# Altium PCB CFD_2Channel.PcbDoc (part 1 of 2)
Units mil, origin at the board's own origin, x right, y up, seen from the top; angles counter-clockwise.
Board outline 14830 x 9705 mil, 4 copper layers (Top Layer, Top Plane, Bottom Plane, Bottom Layer), stack 61.356 mil thick; 263 components, 220 nets, 1141 pads, 50 vias.
Unrouted connection lines stored in the file: 820.
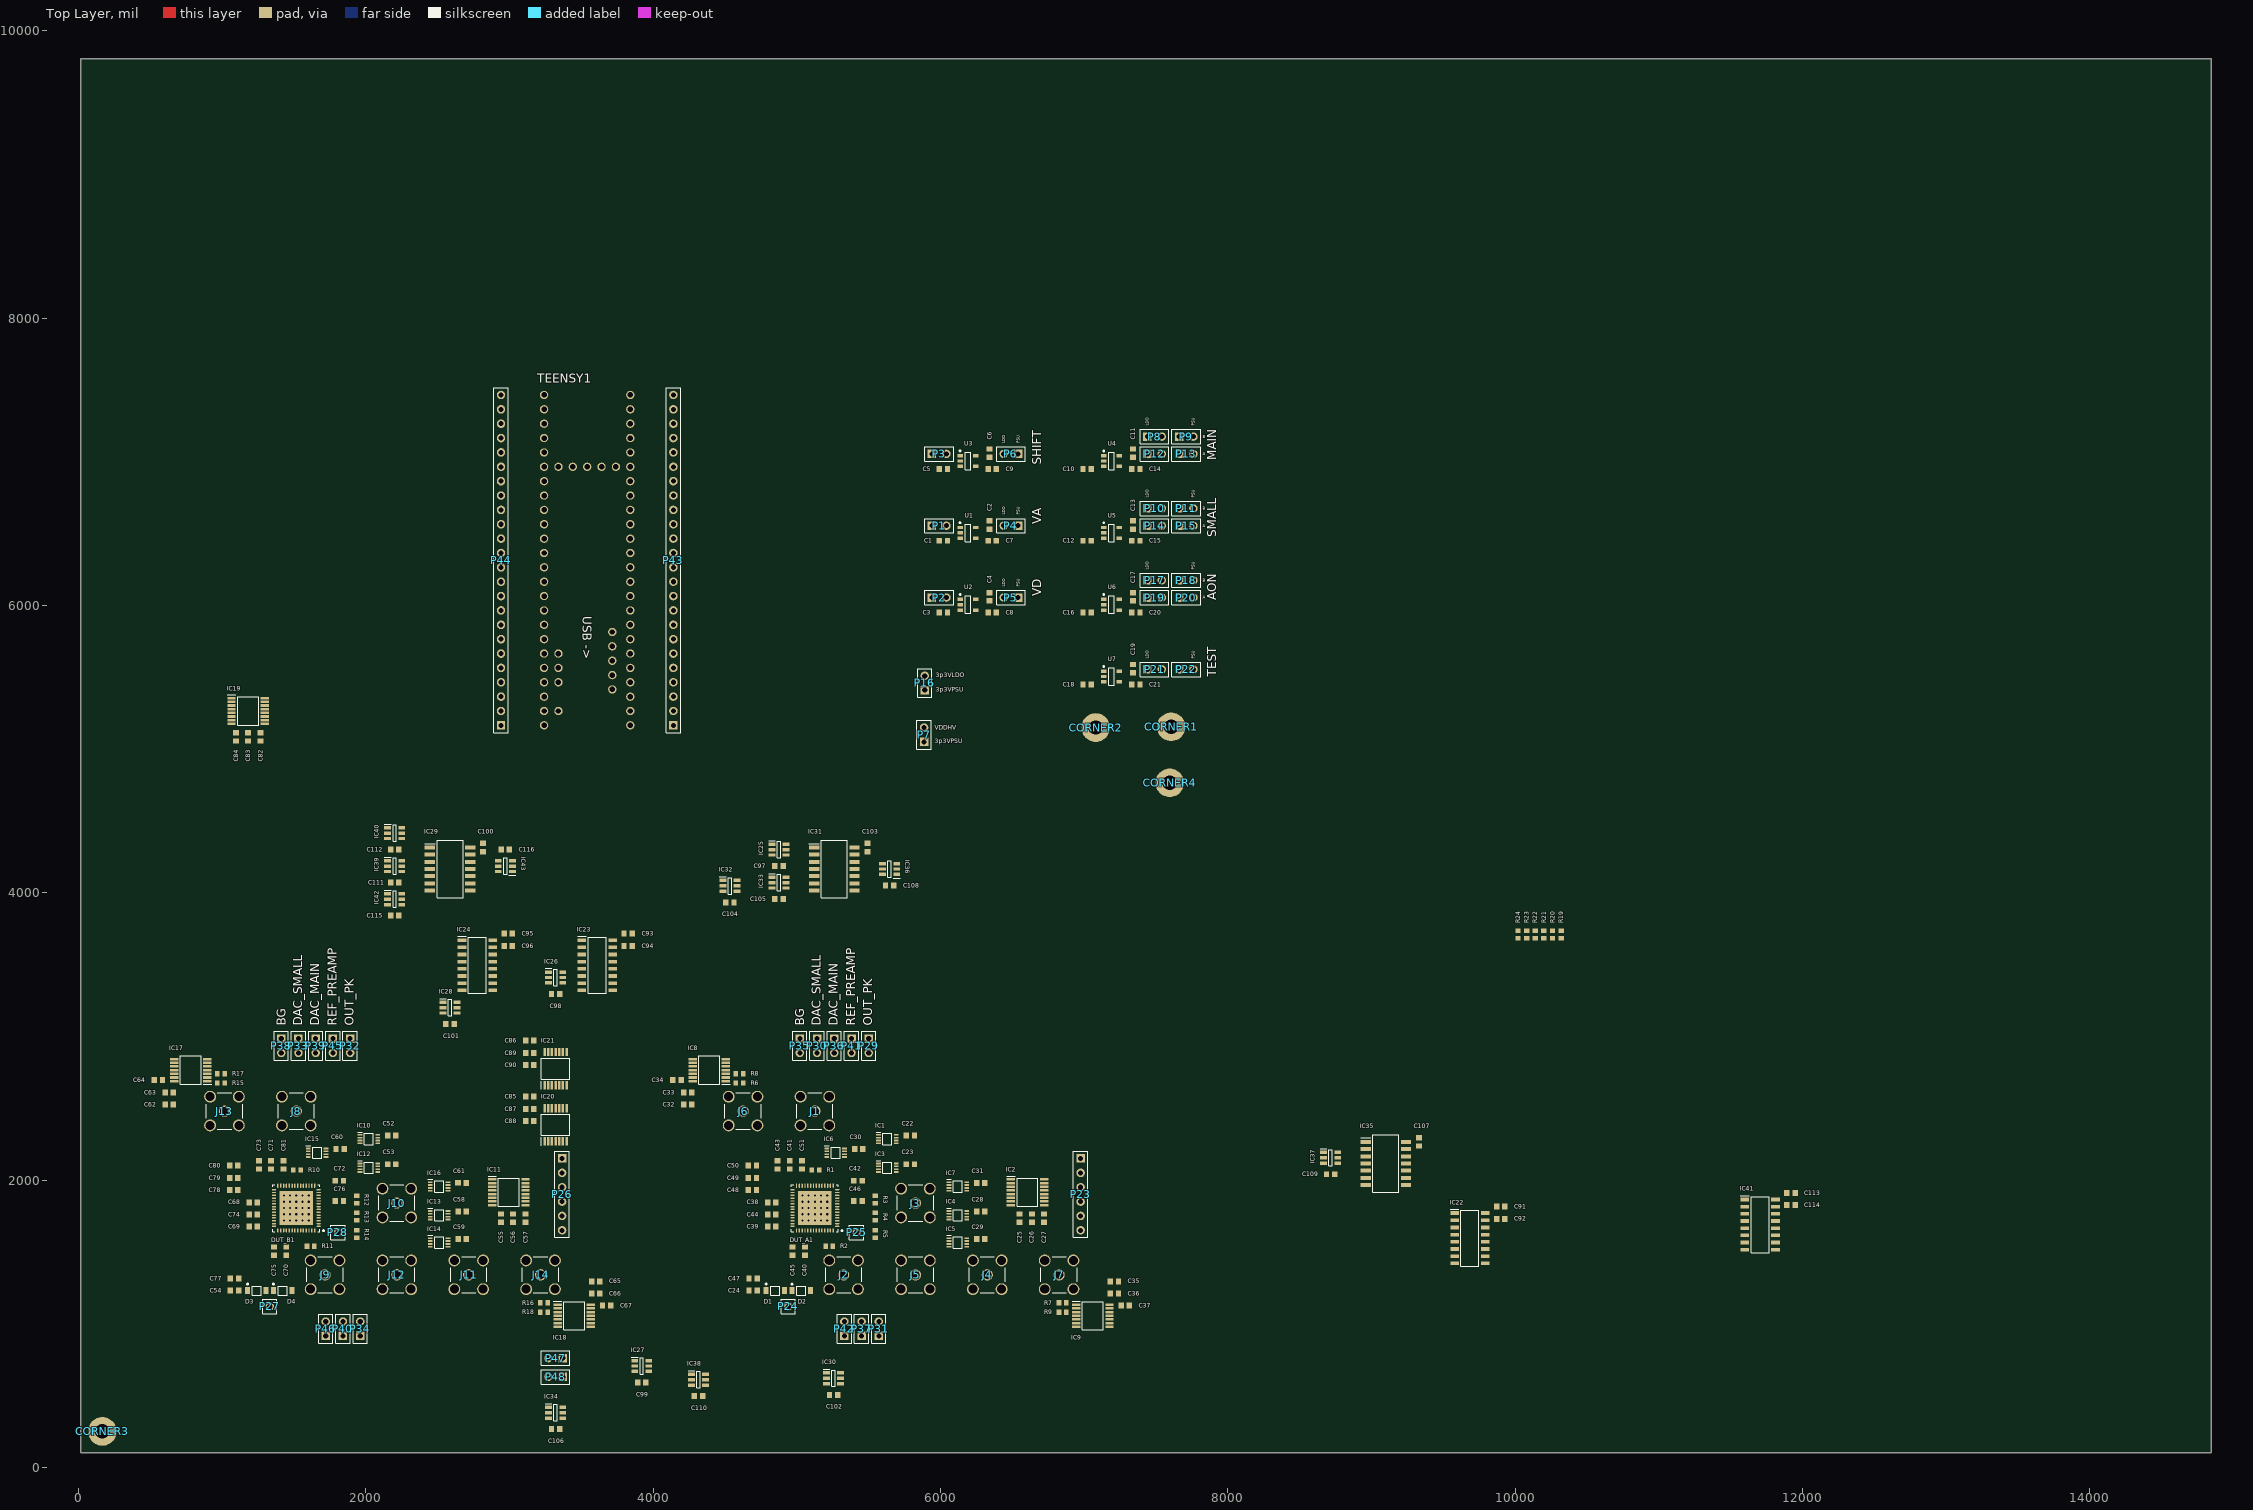
[diagram p0: Top Layer view]
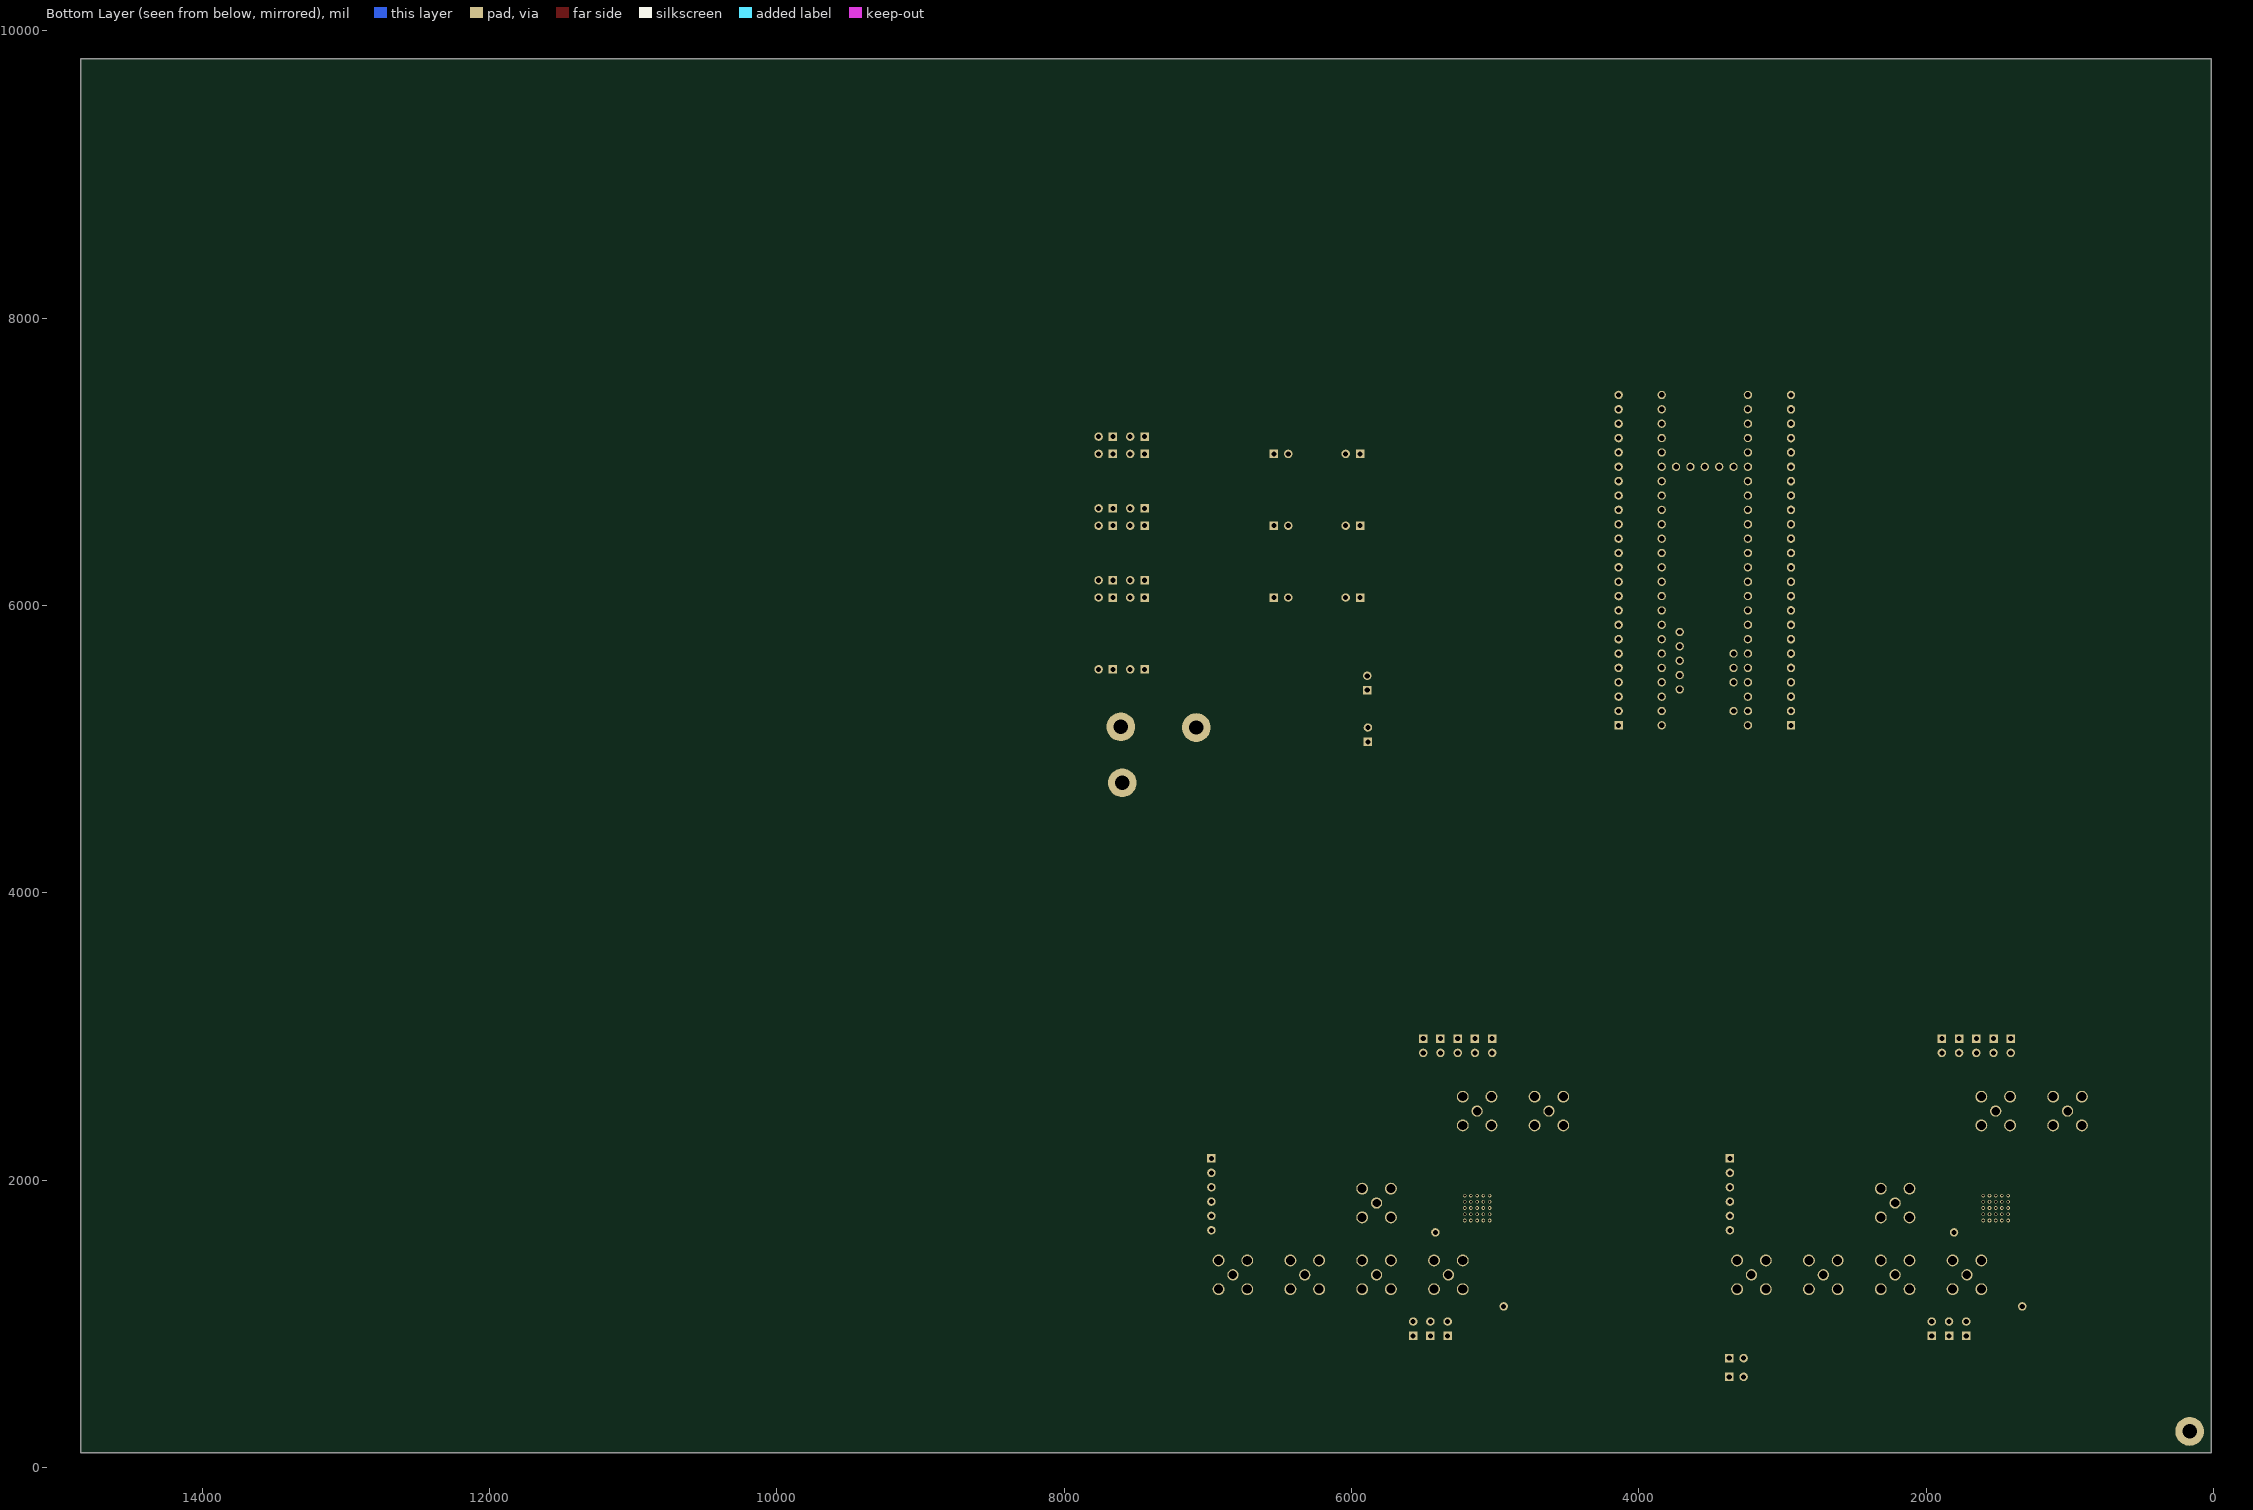
[diagram p1: Bottom Layer view, seen from below]
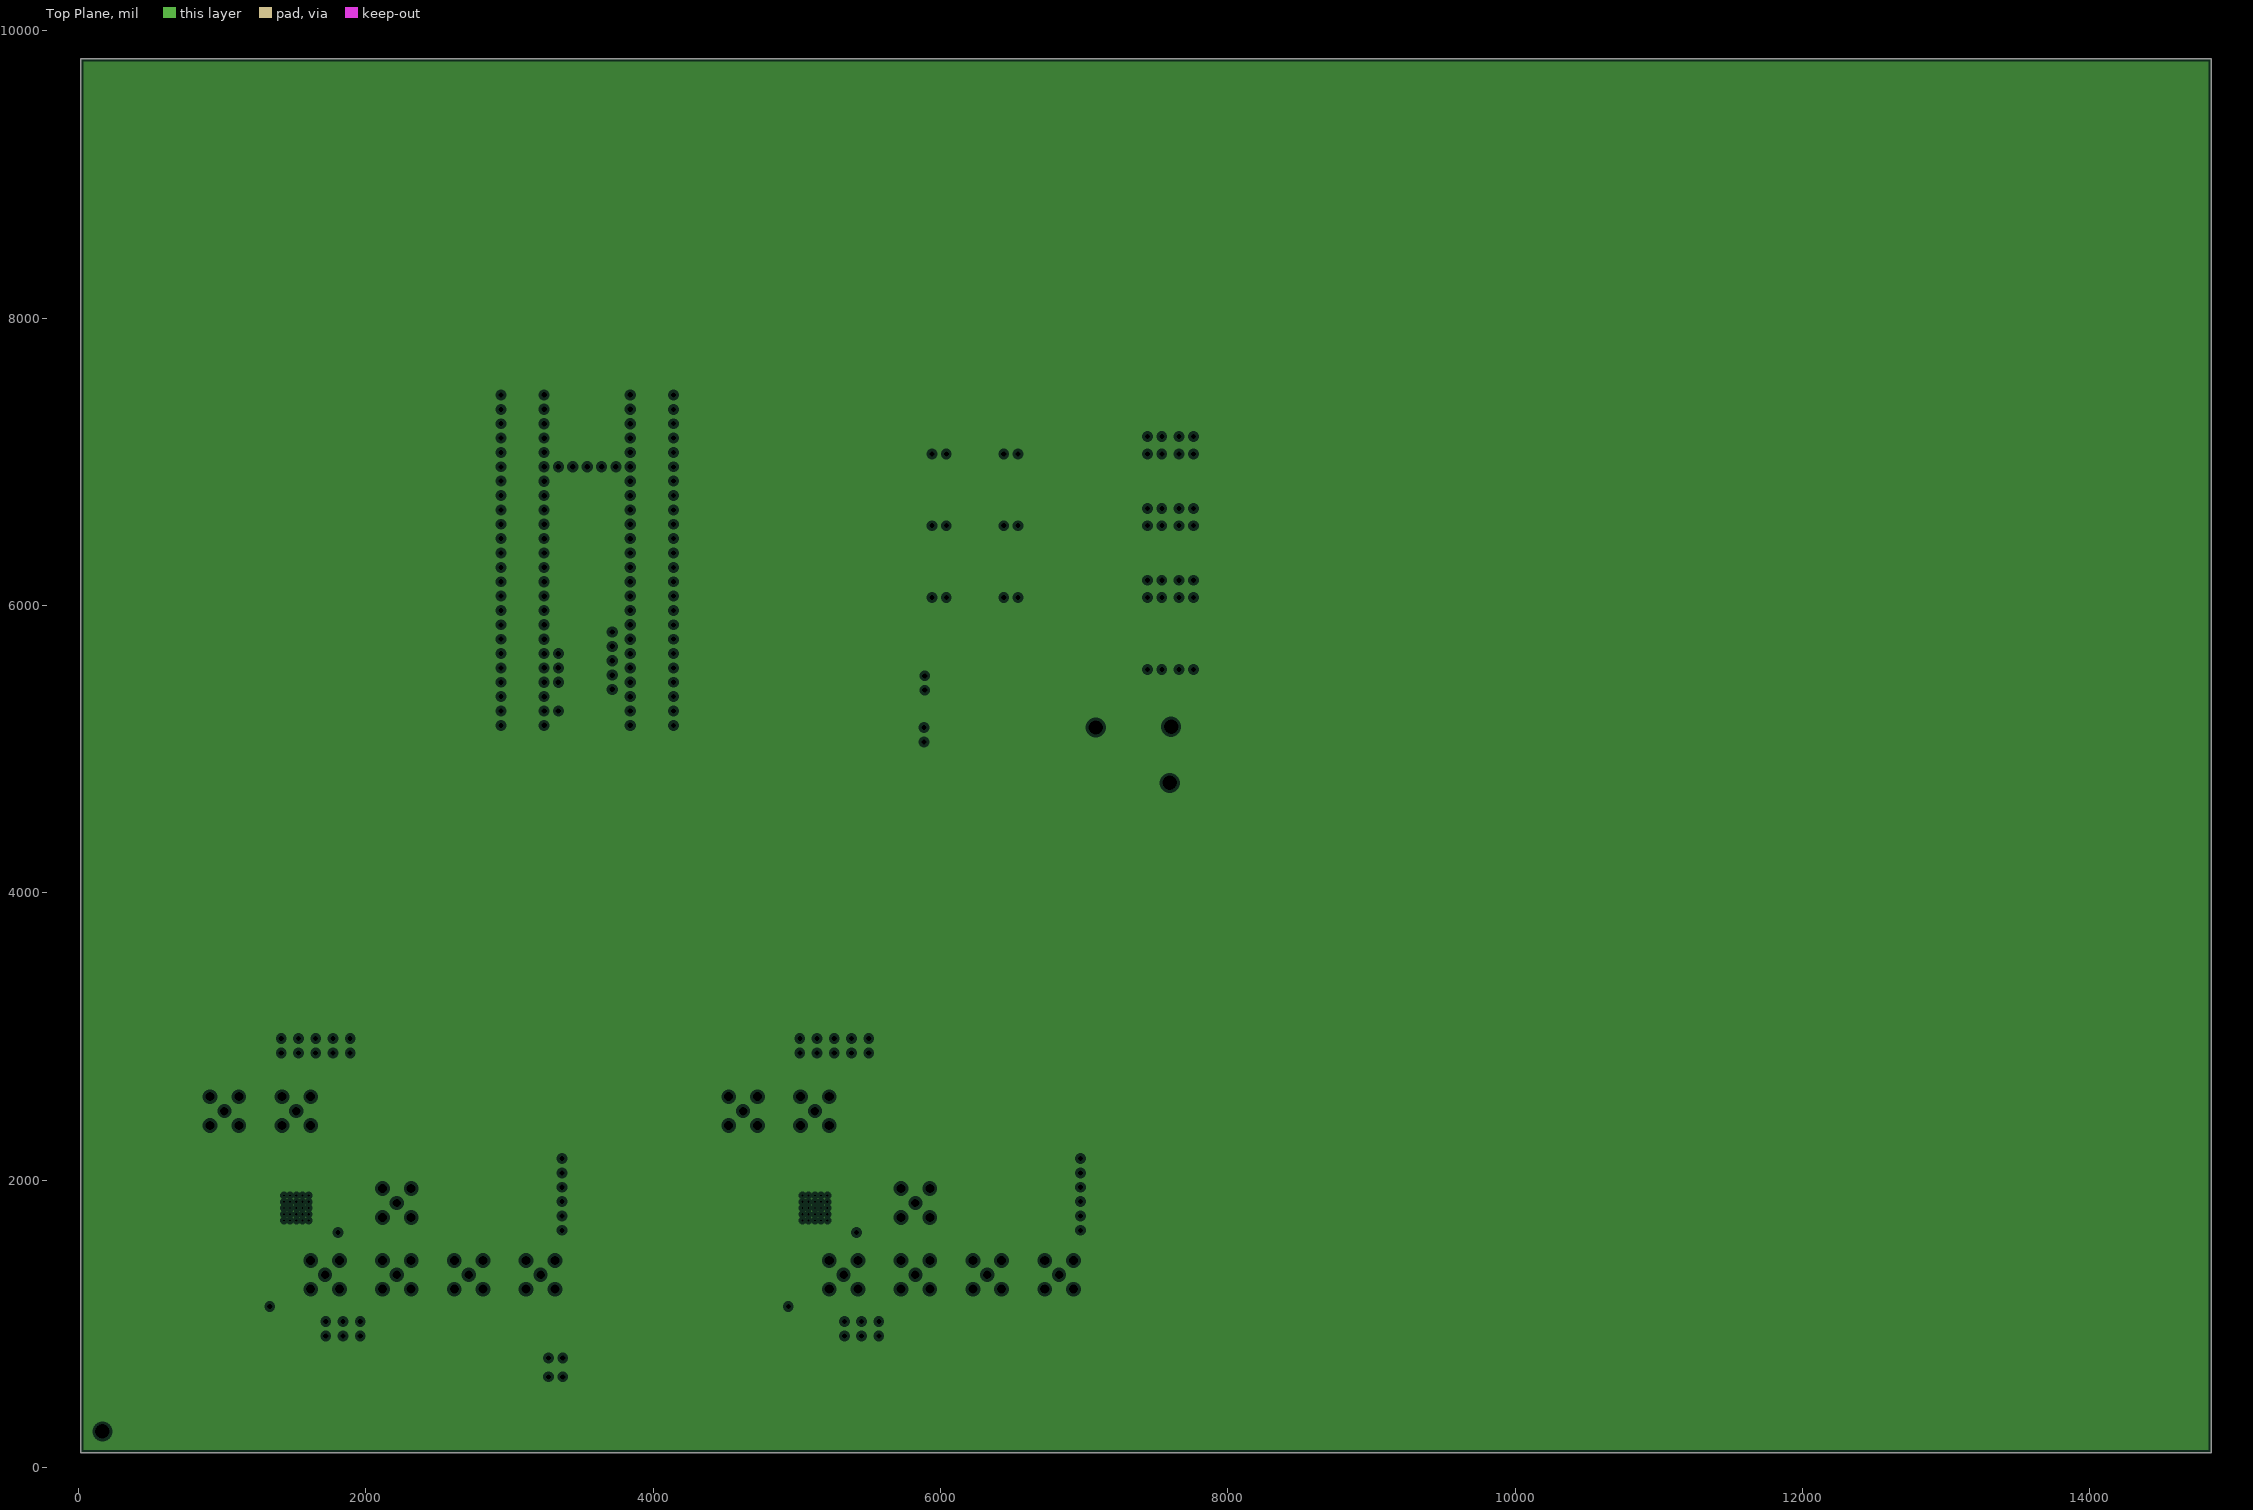
[diagram p2: Top Plane, clearances drawn from the general rule]
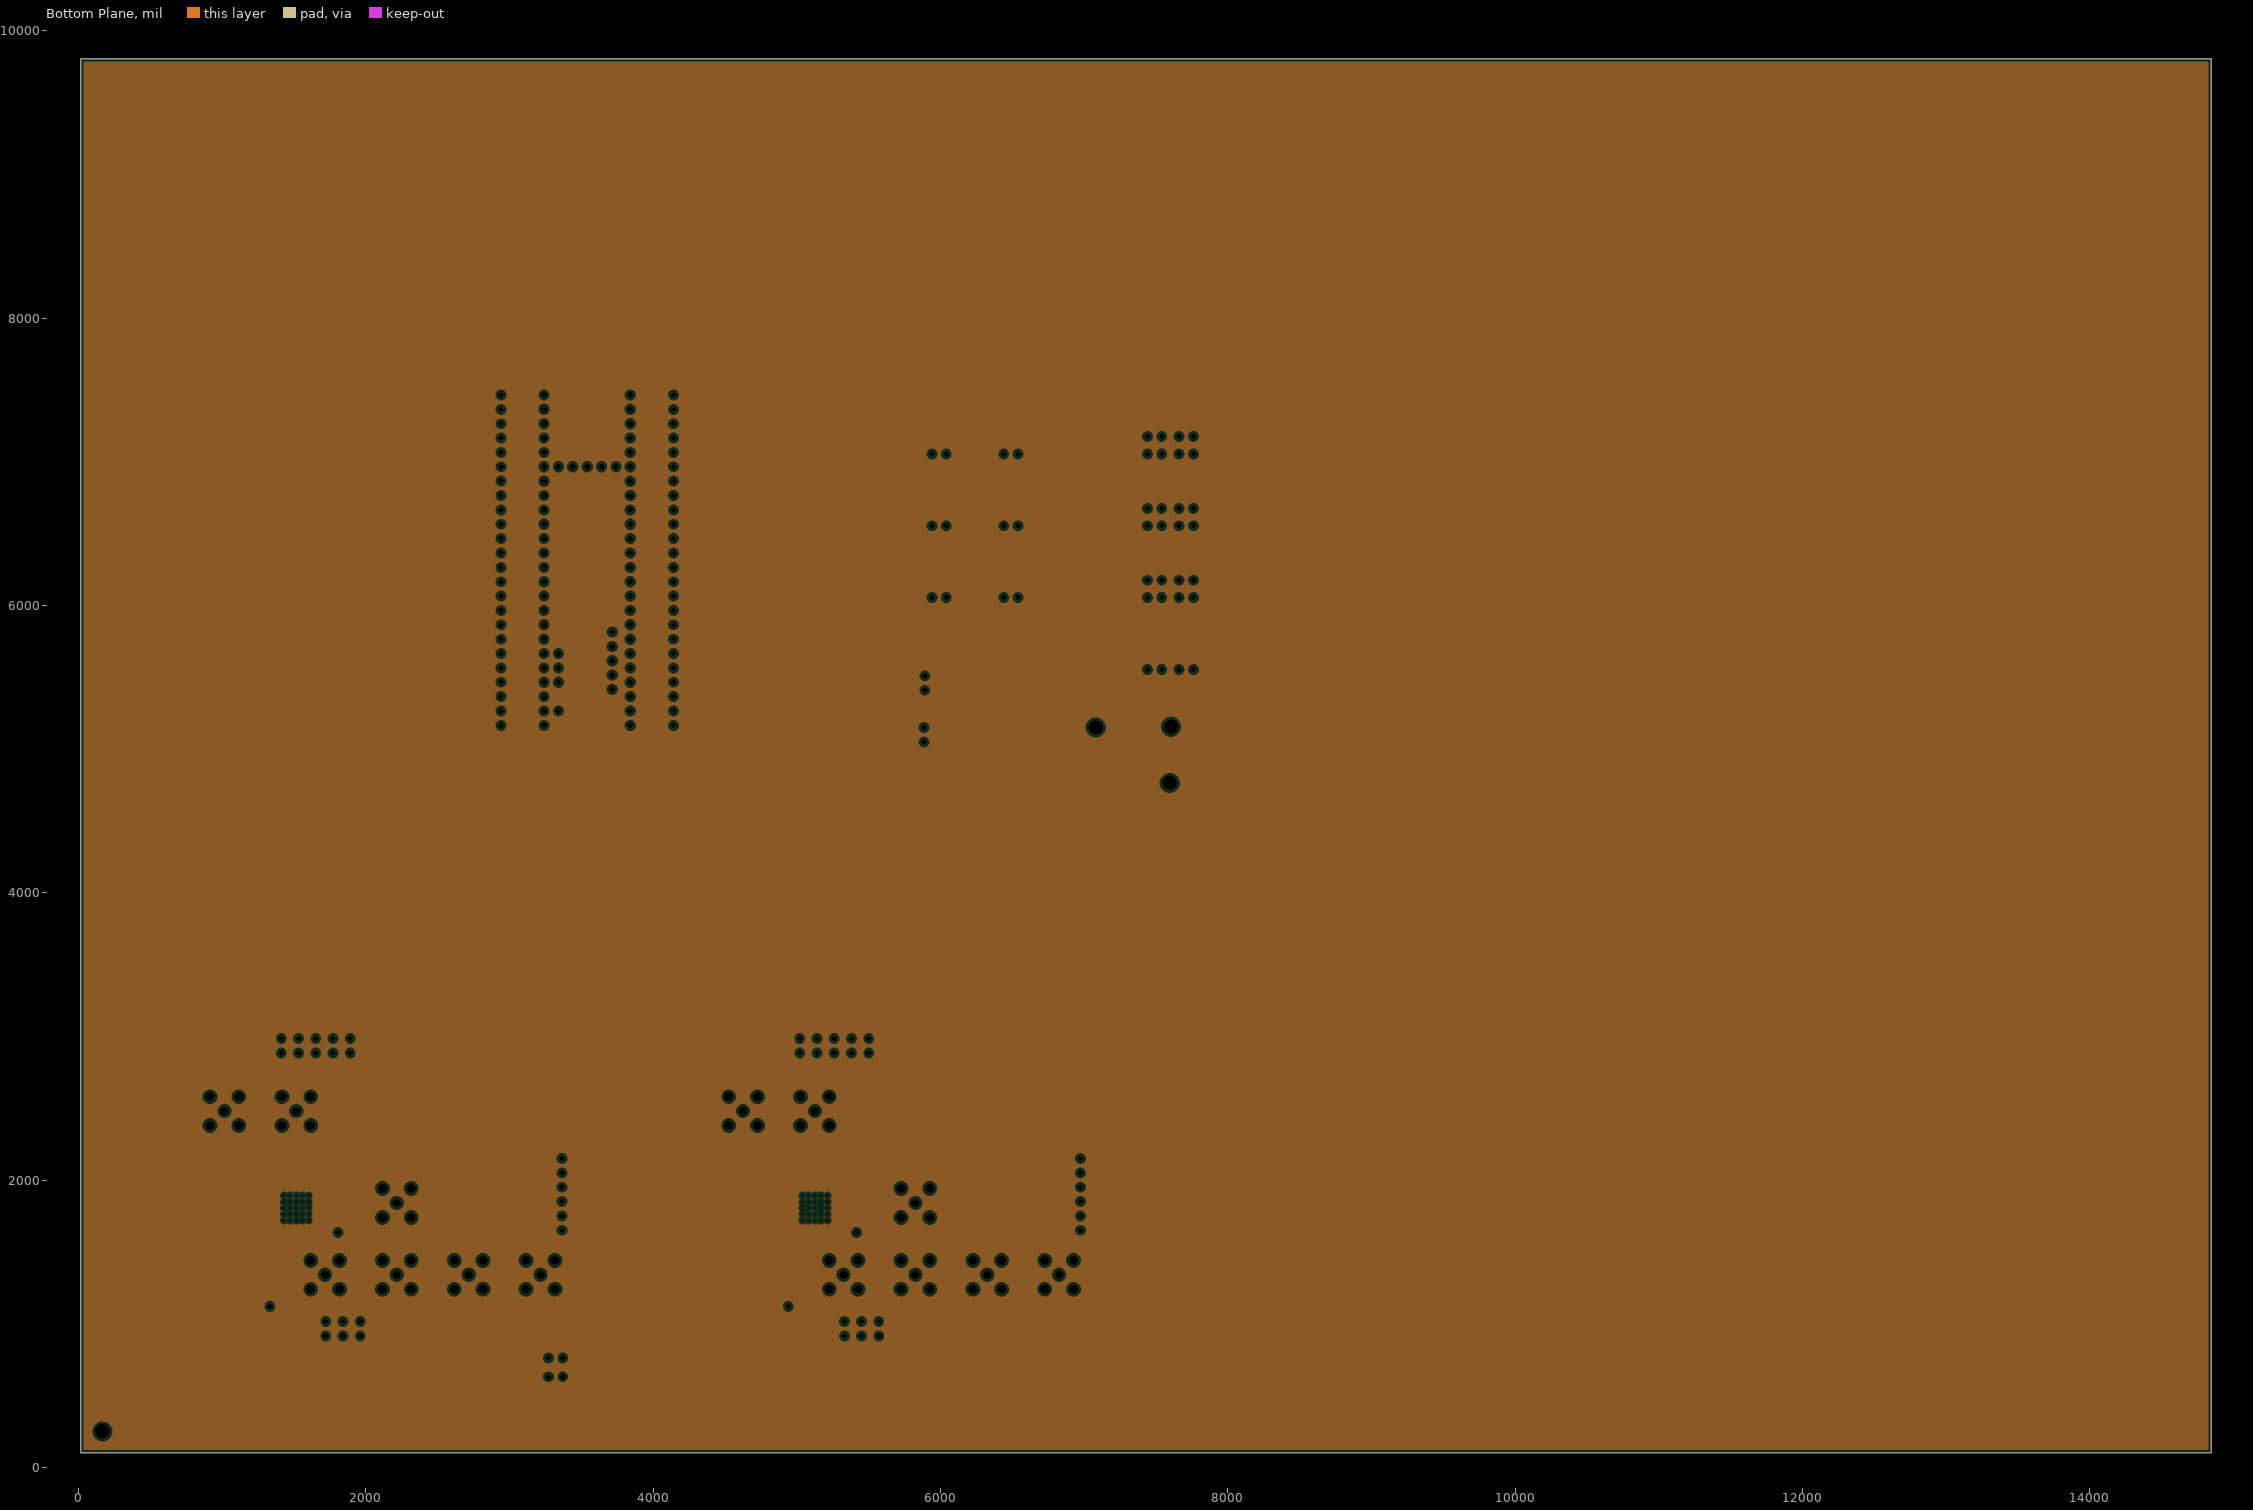
[diagram p3: Bottom Plane, clearances drawn from the general rule]

## Layer stack, top to bottom
Top Solder: solder mask 0.4, Solder Resist, Dk 3.5
Top Layer: signal copper 1.4
Dielectric 2: prepreg 3.8, PP-013, Dk 4.3
Dielectric 4: prepreg 4.6, PP-016, Dk 4.4
Top Plane: plane copper 1.378
Dielectric 1: core 39, Core-042, Dk 4.6
Bottom Plane: plane copper 1.378
Dielectric 5: prepreg 4.6, PP-016, Dk 4.4
Dielectric 3: prepreg 3.8, PP-013, Dk 4.3
Bottom Layer: signal copper 1.4
Bottom Solder: solder mask 0.4, Solder Resist, Dk 3.5

## Board outline
15,100 14845,100 14845,9805 15,9805

## Design rules (kind name [scope] priority, off if disabled: settings)
AcuteAngle [All] p1: minimum=6.00000000000000E+0001 checktracksonly=FALSE
BoardOutlineClearance [All] p1: gap=15 ignorepadtopadclearanceinfootprint=FALSE
Clearance Clearance_outa_inner2 [InNamedPolygon('outa_inner2')] p1: gap=40 ignorepadtopadclearanceinfootprint=FALSE except(0: Arc-Hole Track-Hole SMDPad-Hole THPad-Hole Via-Hole Fill-Hole Poly-Hole Region-Hole Text-Hole)
Clearance Clearance_gnd_adc_vbus [InNamedPolygon('gnd_adc') vs InNet('VBUS')] p2: gap=60 ignorepadtopadclearanceinfootprint=FALSE except(0: Arc-Hole Track-Hole SMDPad-Hole THPad-Hole Via-Hole Fill-Hole Poly-Hole Region-Hole Text-Hole)
Clearance Clearance_gnd_adc [InNamedPolygon('gnd_adc')] p3: gap=20 ignorepadtopadclearanceinfootprint=FALSE except(0: Arc-Hole Track-Hole SMDPad-Hole THPad-Hole Via-Hole Fill-Hole Poly-Hole Region-Hole Text-Hole)
Clearance Clearance_dgnd [InNamedPolygon('dgnd')] p4: gap=15 ignorepadtopadclearanceinfootprint=FALSE except(0: Arc-Hole Track-Hole SMDPad-Hole THPad-Hole Via-Hole Fill-Hole Poly-Hole Region-Hole Text-Hole)
Clearance Clearance_vbus_keepout [InPolygon vs OnLayer('Keep-Out Layer')] p5: gap=20 ignorepadtopadclearanceinfootprint=FALSE except(0: Arc-Hole Track-Hole SMDPad-Hole THPad-Hole Via-Hole Fill-Hole Poly-Hole Region-Hole Text-Hole)
Clearance Clearance_vbus [InNamedPolygon('vbus')] p6: gap=60 ignorepadtopadclearanceinfootprint=FALSE except(0: Arc-Hole Track-Hole SMDPad-Hole THPad-Hole Via-Hole Fill-Hole Poly-Hole Region-Hole Text-Hole)
Clearance Clearance_gnd [InNamedPolygon('gnd')] p7: gap=10 ignorepadtopadclearanceinfootprint=FALSE except(0: Arc-Hole Track-Hole SMDPad-Hole THPad-Hole Via-Hole Fill-Hole Poly-Hole Region-Hole Text-Hole)
Clearance [All] p8: gap=5 ignorepadtopadclearanceinfootprint=FALSE except(0: Arc-Hole Track-Hole SMDPad-Hole THPad-Hole Via-Hole Fill-Hole Poly-Hole Region-Hole Text-Hole)
DiffPairsRouting [All] p1: maxlimit=25 minlimit=5 mostfreqgap=6 toplayer_minwidth=10 toplayer_maxwidth=15 toplayer_prefwidth=15 bottomlayer_minwidth=10 bottomlayer_maxwidth=15 bottomlayer_prefwidth=15 maxuncoupledlength=500
HoleSize [All] p1: absolutevalues=TRUE maxlimit=300 minlimit=10 maxpercent=80.000 minpercent=20.000
MinimumAnnularRing [All] p1: minimumring=5
MinimumSolderMaskSliver [All] p1: minsoldermaskwidth=2
PlaneClearance [All] p1: clearance=20
PlaneConnect [All] p1: planeconnectstyle=Relief reliefexpansion=5 reliefentries=4 reliefconductorwidth=10 reliefairgap=10
PolygonConnect PolygonConnect_4 [All vs IsNamedPolygon('NONET_L-01_P-001')] p1: thpad.connectstyle=Relief thpad.reliefconductorwidth=20 thpad.reliefentries=4 thpad.polygonreliefangle="90 Angle" thpad.airgapwidth=10 smdpad.connectstyle=Direct smdpad.reliefconductorwidth=10 smdpad.reliefentries=4 smdpad.polygonreliefangle="90 Angle" smdpad.airgapwidth=10 via.connectstyle=Relief via.reliefconductorwidth=20 via.reliefentries=4 via.polygonreliefangle="90 Angle" via.airgapwidth=10
PolygonConnect PolygonConnect_3 [All] p2: thpad.connectstyle=Relief thpad.reliefconductorwidth=20 thpad.reliefentries=4 thpad.polygonreliefangle="90 Angle" thpad.airgapwidth=10 smdpad.connectstyle=Direct smdpad.reliefconductorwidth=10 smdpad.reliefentries=4 smdpad.polygonreliefangle="90 Angle" smdpad.airgapwidth=10 via.connectstyle=Relief via.reliefconductorwidth=20 via.reliefentries=4 via.polygonreliefangle="90 Angle" via.airgapwidth=10
PolygonConnect PolygonConnect_2 [All vs IsNamedPolygon('NONET_L-01_P-001')] p3: thpad.connectstyle=Relief thpad.reliefconductorwidth=10 thpad.reliefentries=4 thpad.polygonreliefangle="90 Angle" thpad.airgapwidth=10 smdpad.connectstyle=Direct smdpad.reliefconductorwidth=10 smdpad.reliefentries=4 smdpad.polygonreliefangle="90 Angle" smdpad.airgapwidth=10 via.connectstyle=Relief via.reliefconductorwidth=20 via.reliefentries=4 via.polygonreliefangle="90 Angle" via.airgapwidth=10
PolygonConnect PolygonConnect_1 [All vs IsNamedPolygon('NONET_L-01_P-001')] p4: thpad.connectstyle=Relief thpad.reliefconductorwidth=10 thpad.reliefentries=4 thpad.polygonreliefangle="90 Angle" thpad.airgapwidth=10 smdpad.connectstyle=Direct smdpad.reliefconductorwidth=10 smdpad.reliefentries=4 smdpad.polygonreliefangle="90 Angle" smdpad.airgapwidth=10 via.connectstyle=Relief via.reliefconductorwidth=20 via.reliefentries=4 via.polygonreliefangle="90 Angle" via.airgapwidth=10
PolygonConnect [All] p5: connectstyle=Relief reliefconductorwidth=6 reliefentries=4 polygonreliefangle="90 Angle" airgapwidth=6
RoomDefinition Channel_B [InComponentClass('Channel_B')] p1: confinementstyle=ConfineIn formatcopy=TRUE lockcomponents=FALSE outline 330,925 3940,925 3940,3045 330,3045
RoomDefinition Dual_Channel [InComponentClass('Dual_Channel')] p2: confinementstyle=ConfineIn formatcopy=TRUE lockcomponents=FALSE outline 2850,2215 3735,2215 3735,3110 2850,3110
RoomDefinition Channel_A [InComponentClass('Channel_A')] p3: confinementstyle=ConfineIn formatcopy=TRUE lockcomponents=FALSE outline 3940,925 7550,925 7550,3045 3940,3045
RoutingVias [All] p1: holewidth=12 width=24 viastyle="Through Hole" minholewidth=10 minwidth=22 maxholewidth=200 maxwidth=200
SilkToSilkClearance [All] p1: silktosilkclearance=5
SilkToSolderMaskClearance [IsPad] p1: minsilkscreentomaskgap=3 clearancetoexposedcopper=FALSE
SolderMaskExpansion [All] p1: expansion=2.2 istentingtop=FALSE
Width [All] p1: maxlimit=1000 minlimit=5 preferedwidth=10 minimp=50.000000 maximp=50.000000 favimp=50.000000
23 further rules are at their usual default settings.

## Classes and differential pairs
component class Teensy_Interface: C82 C83 C84 IC19 P29 P30 P31 P32 P33 P34 P35 P36 P37 P38 P39 P40 P41 P42 P43 P44 P45 P46 TEENSY1
component class Power: C1 C2 C3 C4 C5 C6 C7 C8 C9 C10 C11 C12 C13 C14 C15 C16 C17 C18 C19 C20 C21 CORNER1 CORNER2 CORNER3 CORNER4 P1 P2 P3 P4 P5 P6 P7 P8 P9 P10 P11 P12 P13 P14 P15 P16 P17 P18 P19 P20 P21 P22 U1 U2 U3 U4 U5 U6 U7
component class Mux_Demux: C91 C92 C93 C94 C95 C96 C97 C98 C99 C100 C101 C102 C103 C104 C105 C106 C107 C108 C109 C110 C111 C112 C113 C114 C115 C116 IC22 IC23 IC24 IC25 IC26 IC27 IC28 IC29 IC30 IC31 IC32 IC33 IC34 IC35 IC36 IC37 IC38 IC39 IC40 IC41 IC42 IC43 P47 P48 R19 R20 R21 R22 R23 R24
component class Dual_Channel: C85 C86 C87 C88 C89 C90 IC20 IC21
component class Channel_B: C52 C53 C54 C55 C56 C57 C58 C59 C60 C61 C62 C63 C64 C65 C66 C67 C68 C69 C70 C71 C72 C73 C74 C75 C76 C77 C78 C79 C80 C81 D3 D4 DUT_B1 IC10 IC11 IC12 IC13 IC14 IC15 IC16 IC17 IC18 J8 J9 J10 J11 J12 J13 J14 P26 P27 P28 R10 R11 R12 R13 R14 R15 R16 R17 R18
component class Channel_A: C22 C23 C24 C25 C26 C27 C28 C29 C30 C31 C32 C33 C34 C35 C36 C37 C38 C39 C40 C41 C42 C43 C44 C45 C46 C47 C48 C49 C50 C51 D1 D2 DUT_A1 IC1 IC2 IC3 IC4 IC5 IC6 IC7 IC8 IC9 J1 J2 J3 J4 J5 J6 J7 P23 P24 P25 R1 R2 R3 R4 R5 R6 R7 R8 R9

## Components (designator, comment, footprint, x,y, rotation, side; value= is the part's Value field where it differs from the comment)
C1 "(Value)" CAPC1608X90X35ML10T15#1 6020,6450 r180 top
C2 "(Value)" CAPC1608X90X35ML10T15#1 6340,6560 r90 top
C3 "(Value)" CAPC1608X90X35ML10T15#1 6020,5950 r180 top
C4 "(Value)" CAPC1608X90X35ML10T15#1 6340,6060 r90 top
C5 "(Value)" CAPC1608X90X35ML10T15#1 6020,6950 r180 top
C6 "(Value)" CAPC1608X90X35ML10T15#1 6340,7060 r90 top
C7 "(Value)" CAPC1608X90X35ML10T15#1 6360,6450 r0 top
C8 "(Value)" CAPC1608X90X35ML10T15#1 6360,5950 r0 top
C9 "(Value)" CAPC1608X90X35ML10T15#1 6360,6950 r0 top
C10 "(Value)" CAPC1608X90X35ML10T15#1 7020,6950 r180 top
C11 "(Value)" CAPC1608X90X35ML10T15#1 7340,7060 r90 top
C12 "(Value)" CAPC1608X90X35ML10T15#1 7020,6450 r180 top
C13 "(Value)" CAPC1608X90X35ML10T15#1 7340,6560 r90 top
C14 "(Value)" CAPC1608X90X35ML10T15#1 7360,6950 r0 top
C15 "(Value)" CAPC1608X90X35ML10T15#1 7360,6450 r0 top
C16 "(Value)" CAPC1608X90X35ML10T15#1 7020,5950 r180 top
C17 "(Value)" CAPC1608X90X35ML10T15#1 7340,6060 r90 top
C18 "(Value)" CAPC1608X90X35ML10T15#1 7020,5450 r180 top
C19 "(Value)" CAPC1608X90X35ML10T15#1 7340,5560 r90 top
C20 "(Value)" CAPC1608X90X35ML10T15#1 7360,5950 r0 top
C21 "(Value)" CAPC1608X90X35ML10T15#1 7360,5450 r0 top
C22 "10nF" CAPC1608X90X35ML10T15#1 5790,2310 r0 top
C23 "10nF" CAPC1608X90X35ML10T15#1 5790,2110 r0 top
C24 "10nF" CAPC1608X90X35ML10T15#1 4695,1230 r0 top
C25 "100nF" CAPC1608X90X35ML10T15#1 6550,1735 r90 top
C26 "100nF" CAPC1608X90X35ML10T15#1 6635,1735 r90 top
C27 "10nF" CAPC1608X90X35ML10T15#1 6720,1735 r90 top
C28 "10nF" CAPC1608X90X35ML10T15#1 6280,1780 r0 top
C29 "10nF" CAPC1608X90X35ML10T15#1 6280,1590 r180 top
C30 "10nF" CAPC1608X90X35ML10T15#1 5430,2215 r180 top
C31 "10nF" CAPC1608X90X35ML10T15#1 6280,1980 r180 top
C32 "100nF" CAPC1608X90X35ML10T15#1 4240,2525 r180 top
C33 "1uF" CAPC1608X90X35ML10T15#1 4240,2610 r180 top
C34 "1uF" CAPC1608X90X35ML10T15#1 4165,2695 r180 top
C35 "100nF" CAPC1608X90X35ML10T15#1 7210,1295 r0 top
C36 "1uF" CAPC1608X90X35ML10T15#1 7210,1210 r0 top
C37 "1uF" CAPC1608X90X35ML10T15#1 7285,1125 r0 top
C38 "10nF" CAPC1608X90X35ML10T15#1 4825,1845 r0 top
C39 "10nF" CAPC1608X90X35ML10T15#1 4825,1675 r0 top
C40 "10nF" CAPC1608X90X35ML10T15#1 5055,1505 r90 top
C41 "10nF" CAPC1608X90X35ML10T15#1 4950,2105 r270 top
C42 "10nF" CAPC1608X90X35ML10T15#1 5425,1995 r180 top
C43 "10nF" CAPC1608X90X35ML10T15#1 4865,2105 r270 top
C44 "10nF" CAPC1608X90X35ML10T15#1 4825,1760 r0 top
C45 "10nF" CAPC1608X90X35ML10T15#1 4970,1505 r90 top
C46 "10nF" CAPC1608X90X35ML10T15#1 5425,1855 r180 top
C47 "10nF" CAPC1608X90X35ML10T15#1 4695,1315 r0 top
C48 "10nF" CAPC1608X90X35ML10T15#1 4690,1930 r0 top
C49 "10nF" CAPC1608X90X35ML10T15#1 4690,2015 r0 top
C50 "10nF" CAPC1608X90X35ML10T15#1 4690,2100 r0 top
C51 "10nF" CAPC1608X90X35ML10T15#1 5035,2105 r270 top
C52 "10nF" CAPC1608X90X35ML10T15#1 2180,2310 r180 top
C53 "10nF" CAPC1608X90X35ML10T15#1 2180,2110 r180 top
C54 "10nF" CAPC1608X90X35ML10T15#1 1085,1230 r0 top
C55 "100nF" CAPC1608X90X35ML10T15#1 2940,1735 r90 top
C56 "100nF" CAPC1608X90X35ML10T15#1 3025,1735 r90 top
C57 "10nF" CAPC1608X90X35ML10T15#1 3110,1735 r90 top
C58 "10nF" CAPC1608X90X35ML10T15#1 2670,1780 r180 top
C59 "10nF" CAPC1608X90X35ML10T15#1 2670,1590 r180 top
C60 "10nF" CAPC1608X90X35ML10T15#1 1820,2215 r180 top
C61 "10nF" CAPC1608X90X35ML10T15#2 2670,1980 r180 top
C62 "100nF" CAPC1608X90X35ML10T15#1 630,2525 r180 top
C63 "1uF" CAPC1608X90X35ML10T15#1 630,2610 r180 top
C64 "1uF" CAPC1608X90X35ML10T15#1 555,2695 r180 top
C65 "100nF" CAPC1608X90X35ML10T15#1 3600,1295 r0 top
C66 "1uF" CAPC1608X90X35ML10T15#1 3600,1210 r0 top
C67 "1uF" CAPC1608X90X35ML10T15#1 3675,1125 r0 top
C68 "10nF" CAPC1608X90X35ML10T15#1 1215,1845 r0 top
C69 "10nF" CAPC1608X90X35ML10T15#1 1215,1675 r0 top
C70 "10nF" CAPC1608X90X35ML10T15#1 1445,1505 r90 top
C71 "10nF" CAPC1608X90X35ML10T15#1 1340,2105 r270 top
C72 "10nF" CAPC1608X90X35ML10T15#1 1815,1995 r180 top
C73 "10nF" CAPC1608X90X35ML10T15#1 1255,2105 r270 top
C74 "10nF" CAPC1608X90X35ML10T15#1 1215,1760 r0 top
C75 "10nF" CAPC1608X90X35ML10T15#1 1360,1505 r90 top
C76 "10nF" CAPC1608X90X35ML10T15#1 1815,1855 r180 top
C77 "10nF" CAPC1608X90X35ML10T15#1 1085,1315 r0 top
C78 "10nF" CAPC1608X90X35ML10T15#1 1080,1930 r0 top
C79 "10nF" CAPC1608X90X35ML10T15#1 1080,2015 r0 top
C80 "10nF" CAPC1608X90X35ML10T15#1 1080,2100 r0 top
C81 "10nF" CAPC1608X90X35ML10T15#1 1425,2105 r270 top
C82 "1uF" CAPC1608X90X35ML10T15#1 1265,5085 r90 top
C83 "100nF" CAPC1608X90X35ML10T15#1 1180,5085 r90 top
C84 "100nF" CAPC1608X90X35ML10T15#1 1095,5085 r270 top
C85 "1uF" CAPC1608X90X35ML10T15#1 3140,2580 r180 top
C86 "1uF" CAPC1608X90X35ML10T15#1 3140,2970 r180 top
C87 "100nF" CAPC1608X90X35ML10T15#1 3140,2495 r180 top
C88 "1uF" CAPC1608X90X35ML10T15#1 3140,2410 r180 top
C89 "100nF" CAPC1608X90X35ML10T15#1 3140,2885 r180 top
C90 "1uF" CAPC1608X90X35ML10T15#1 3140,2800 r180 top
C91 "10nF" CAPC1608X90X35ML10T15#1 9900,1815 r0 top
C92 "10nF" CAPC1608X90X35ML10T15#1 9900,1730 r0 top
C93 "10nF" CAPC1608X90X35ML10T15#1 3825,3715 r0 top
C94 "10nF" CAPC1608X90X35ML10T15#1 3825,3630 r0 top
C95 "10nF" CAPC1608X90X35ML10T15#1 2990,3715 r0 top
C96 "10nF" CAPC1608X90X35ML10T15#1 2990,3630 r0 top
C97 "10nF" CAPC1608X90X35ML10T15#1 4875,4185 r180 top
C98 "10nF" CAPC1608X90X35ML10T15#1 3320,3295 r180 top
C99 "10nF" CAPC1608X90X35ML10T15#1 3920,590 r180 top
C100 "10nF" CAPC1608X90X35ML10T15#1 2815,4315 r270 top
C101 "10nF" CAPC1608X90X35ML10T15#1 2585,3085 r180 top
C102 "10nF" CAPC1608X90X35ML10T15#1 5255,505 r180 top
C103 "10nF" CAPC1608X90X35ML10T15#1 5490,4315 r270 top
C104 "10nF" CAPC1608X90X35ML10T15#1 4533.61,3933.06 r180 top
C105 "10nF" CAPC1608X90X35ML10T15#1 4875,3955 r180 top
C106 "10nF" CAPC1608X90X35ML10T15#1 3320,265.27 r180 top
C107 "10nF" CAPC1608X90X35ML10T15#1 9330,2265 r90 top
C108 "10nF" CAPC1608X90X35ML10T15#1 5645,4050 r180 top
C109 "10nF" CAPC1608X90X35ML10T15#1 8715,2040 r180 top
C110 "10nF" CAPC1608X90X35ML10T15#1 4315,495 r180 top
C111 "10nF" CAPC1608X90X35ML10T15#1 2200,4070 r180 top
C112 "10nF" CAPC1608X90X35ML10T15#1 2200,4300 r180 top
C113 "10nF" CAPC1608X90X35ML10T15#1 11920,1910 r0 top
C114 "10nF" CAPC1608X90X35ML10T15#1 11920,1825 r0 top
C115 "10nF" CAPC1608X90X35ML10T15#1 2200,3840 r180 top
C116 "10nF" CAPC1608X90X35ML10T15#1 2970,4300 r180 top
CORNER1 "Corner Mount" CornerMount#1 7605,5155 r90 top
CORNER2 "Corner Mount" CornerMount#1 7080,5150 r90 top
CORNER3 "Corner Mount" CornerMount#2 7395,3760 r90 top
CORNER4 "Corner Mount" CornerMount#1 7595,4765 r90 top
D1 "" ONSC-SOD-123-2-425-04_V 4850,1230 r0 top
D2 "" ONSC-SOD-123-2-425-04_V 5030,1230 r0 top
D3 "" ONSC-SOD-123-2-425-04_V 1240,1230 r0 top
D4 "" ONSC-SOD-123-2-425-04_V 1420,1230 r0 top
DUT_A1 "CFD_Respin" QFN50P800X800X80_HS-57N_WIDEVIAS 5125,1805 r180 top
DUT_B1 "CFD_Respin" QFN50P800X800X80_HS-57N_WIDEVIAS 1515,1805 r180 top
IC1 "NL17SZ74USG" SOP50P310X90-8N 5630,2285 r0 top
IC2 "MAX13003EEUE+" SOP65P640X110-16N 6605,1915 r0 top
IC3 "NL17SZ74USG" SOP50P310X90-8N 5630,2085 r0 top
IC4 "NL17SZ74USG" SOP50P310X90-8N 6120,1755 r0 top
IC5 "NL17SZ74USG" SOP50P310X90-8N 6120,1565 r0 top
IC6 "NL17SZ74USG" SOP50P310X90-8N 5270,2190 r0 top
IC7 "NL17SZ74USG" SOP50P310X90-8N 6120,1955 r0 top
IC8 "TDC7200PWR" SOP65P640X120-14N 4390,2765 r180 top
IC9 "TDC7200PWR" SOP65P640X120-14N 7060,1055 r0 top
IC10 "NL17SZ74USG" SOP50P310X90-8N 2020,2285 r0 top
IC11 "MAX13003EEUE+" SOP65P640X110-16N 2995,1915 r0 top
IC12 "NL17SZ74USG" SOP50P310X90-8N 2020,2085 r0 top
IC13 "NL17SZ74USG" SOP50P310X90-8N 2510,1755 r0 top
IC14 "NL17SZ74USG" SOP50P310X90-8N 2510,1565 r0 top
IC15 "NL17SZ74USG" SOP50P310X90-8N 1660,2190 r0 top
IC16 "NL17SZ74USG" SOP50P310X90-8N 2510,1955 r0 top
IC17 "TDC7200PWR" SOP65P640X120-14N 780,2765 r180 top
IC18 "TDC7200PWR" SOP65P640X120-14N 3450,1055 r0 top
IC19 "MAX13003EEUE+" SOP65P640X110-16N 1180,5265 r0 top
IC20 "TDC7200PWR" SOP65P640X120-14N 3320,2385 r90 top
IC21 "TDC7200PWR" SOP65P640X120-14N 3320,2775 r90 top
IC22 "CD74AC153M96" SOIC127P600X175-16N 9685,1595 r0 top
IC23 "CD74AC153M96" SOIC127P600X175-16N 3610,3495 r0 top
IC24 "CD74AC153M96" SOIC127P600X175-16N 2775,3495 r0 top
IC25 "SN74AUC1G19DBVR" SOT95P280X145-6N 4875,4300 r0 top
IC26 "SN74AUC1G19DBVR" SOT95P280X145-6N 3320,3410 r0 top
IC27 "SN74AUC1G19DBVR" SOT95P280X145-6N 3920,705 r0 top
IC28 "SN74AUC1G19DBVR" SOT95P280X145-6N 2585,3200 r0 top
IC29 "SN74LVC04ANS" SOIC127P780X200-14N 2585,4165 r0 top
IC30 "SN74AUC1G19DBVR" SOT95P280X145-6N 5255,620 r0 top
IC31 "SN74LVC04ANS" SOIC127P780X200-14N 5260,4165 r0 top
IC32 "SN74AUC1G19DBVR" SOT95P280X145-6N 4533.61,4048.06 r0 top
IC33 "SN74AUC1G19DBVR" SOT95P280X145-6N 4875,4070 r0 top
IC34 "SN74AUC1G19DBVR" SOT95P280X145-6N 3320,380.27 r0 top
IC35 "SN74LVC04ANS" SOIC127P780X200-14N 9100,2115 r0 top
IC36 "SN74AUC1G19DBVR" SOT95P280X145-6N 5645,4165 r180 top
IC37 "SN74AUC1G19DBVR" SOT95P280X145-6N 8715,2155 r0 top
IC38 "SN74AUC1G19DBVR" SOT95P280X145-6N 4315,610 r0 top
IC39 "SN74AUC1G19DBVR" SOT95P280X145-6N 2200,4185 r0 top
IC40 "SN74AUC1G19DBVR" SOT95P280X145-6N 2200,4415 r0 top
IC41 "CD74AC153M96" SOIC127P600X175-16N 11705,1690 r0 top
IC42 "SN74AUC1G19DBVR" SOT95P280X145-6N 2200,3955 r0 top
IC43 "SN74AUC1G19DBVR" SOT95P280X145-6N 2970,4185 r180 top
J1 "5-1814832-1" TECO-5-1814832-1_V 5125,2480 r0 top
J2 "5-1814832-1" TECO-5-1814832-1_V 5325,1340 r0 top
J3 "5-1814832-1" TECO-5-1814832-1_V 5825,1840 r0 top
J4 "5-1814832-1" TECO-5-1814832-1_V 6325,1340 r0 top
J5 "5-1814832-1" TECO-5-1814832-1_V 5825,1340 r0 top
J6 "5-1814832-1" TECO-5-1814832-1_V 4625,2480 r0 top
J7 "5-1814832-1" TECO-5-1814832-1_V 6825,1340 r0 top
J8 "5-1814832-1" TECO-5-1814832-1_V 1515,2480 r0 top
J9 "5-1814832-1" TECO-5-1814832-1_V 1715,1340 r0 top
J10 "5-1814832-1" TECO-5-1814832-1_V 2215,1840 r0 top
J11 "5-1814832-1" TECO-5-1814832-1_V 2715,1340 r0 top
J12 "5-1814832-1" TECO-5-1814832-1_V 2215,1340 r0 top
J13 "5-1814832-1" TECO-5-1814832-1_V 1015,2480 r180 top
J14 "5-1814832-1" TECO-5-1814832-1_V 3215,1340 r0 top
P1 "Header 2" HDR1X2 5940,6555 r0 top
P2 "Header 2" HDR1X2 5940,6055 r0 top
P3 "Header 2" HDR1X2 5940,7055 r0 top
P4 "Header 2" HDR1X2 6540,6555 r180 top
P5 "Header 2" HDR1X2 6540,6055 r180 top
P6 "Header 2" HDR1X2 6540,7055 r180 top
P7 "Header 2" HDR1X2 5885,5050 r90 top
P8 "Header 2" HDR1X2 7440,7175 r0 top
P9 "Header 2" HDR1X2 7660,7175 r0 top
P10 "Header 2" HDR1X2 7440,6675 r0 top
P11 "Header 2" HDR1X2 7660,6675 r0 top
P12 "Header 2" HDR1X2 7440,7055 r0 top
P13 "Header 2" HDR1X2 7660,7055 r0 top
P14 "Header 2" HDR1X2 7440,6555 r0 top
P15 "Header 2" HDR1X2 7660,6555 r0 top
P16 "Header 2" HDR1X2 5890,5410 r90 top
P17 "Header 2" HDR1X2 7440,6175 r0 top
P18 "Header 2" HDR1X2 7660,6175 r0 top
P19 "Header 2" HDR1X2 7440,6055 r0 top
P20 "Header 2" HDR1X2 7660,6055 r0 top
P21 "Header 2" HDR1X2 7440,5555 r0 top
P22 "Header 2" HDR1X2 7660,5555 r0 top
P23 "Header 6" HDR1X6 6975,2150 r270 top
P24 "Header 1" Header1 4940,1120 r0 top
P25 "Header 1" Header1 5415,1635 r0 top
P26 "Header 6" HDR1X6 3365,2150 r270 top
P27 "Header 1" Header1 1330,1120 r0 top
P28 "Header 1" Header1 1805,1635 r0 top
P29 "Header 2" HDR1X2 5500,2985 r270 top
P30 "Header 2" HDR1X2 5140,2985 r270 top
P31 "Header 2" HDR1X2 5570,915 r90 top
P32 "Header 2" HDR1X2 1890,2985 r270 top
P33 "Header 2" HDR1X2 1530,2985 r270 top
P34 "Header 2" HDR1X2 1960,915 r90 top
P35 "Header 2" HDR1X2 5020,2985 r270 top
P36 "Header 2" HDR1X2 5260,2985 r270 top
P37 "Header 2" HDR1X2 5450,915 r90 top
P38 "Header 2" HDR1X2 1410,2985 r270 top
P39 "Header 2" HDR1X2 1650,2985 r270 top
P40 "Header 2" HDR1X2 1840,915 r90 top
P41 "Header 2" HDR1X2 5380,2985 r270 top
P42 "Header 2" HDR1X2 5330,915 r90 top
P43 "Header 24" HDR1X24 4140,5165 r90 top
P44 "Header 24" HDR1X24 2940,5165 r90 top
P45 "Header 2" HDR1X2 1770,2985 r270 top
P46 "Header 2" HDR1X2 1720,915 r90 top
P47 "Header 2" HDR1X2 3370,760 r180 top
P48 "Header 2" HDR1X2 3370,630 r180 top
R1 "(50Ohm)" RESC1609X50X30NL8T20 5130,2070 r0 top
R2 "(50Ohm)" RESC1609X50X30NL8T20 5225,1540 r0 top
R3 "(50Ohm)" RESC1609X50X30NL8T20 5545,1865 r270 top
R4 "(50Ohm)" RESC1609X50X30NL8T20 5545,1745 r270 top
R5 "(50Ohm)" RESC1609X50X30NL8T20 5545,1625 r90 top
R6 "(50Ohm)" RESC1609X50X30NL8T20 4600,2675 r0 top
R7 "(50Ohm)" RESC1609X50X30NL8T20 6850,1145 r180 top
R8 "(<50Ohm)" RESC1609X50X30NL8T20 4600,2740 r180 top
R9 "(<50Ohm)" RESC1609X50X30NL8T20 6850,1080 r0 top
R10 "(50Ohm)" RESC1609X50X30NL8T20 1520,2070 r0 top
R11 "(50Ohm)" RESC1609X50X30NL8T20 1615,1540 r180 top
R12 "(50Ohm)" RESC1609X50X30NL8T20 1935,1865 r270 top
R13 "(50Ohm)" RESC1609X50X30NL8T20 1935,1745 r270 top
R14 "(50Ohm)" RESC1609X50X30NL8T20 1935,1625 r90 top
R15 "(50Ohm)" RESC1609X50X30NL8T20 990,2675 r0 top
R16 "(50Ohm)" RESC1609X50X30NL8T20 3240,1145 r180 top
R17 "(<50Ohm)" RESC1609X50X30NL8T20 990,2740 r180 top
R18 "(<50Ohm)" RESC1609X50X30NL8T20 3240,1080 r0 top
R19 "0Ohm" RESC1609X50X30NL8T20 10320,3710 r90 top
R20 "0Ohm" RESC1609X50X30NL8T20 10260,3710 r90 top
R21 "0Ohm" RESC1609X50X30NL8T20 10200,3710 r90 top
R22 "0Ohm" RESC1609X50X30NL8T20 10140,3710 r90 top
R23 "0Ohm" RESC1609X50X30NL8T20 10080,3710 r90 top
R24 "0Ohm" RESC1609X50X30NL8T20 10020,3710 r90 top
TEENSY1 "TEENSY_3.5/3.6" TEENSY_3.5/3.6 3540,6265 r90 top
U1 "TPS73218DBVT" DBV0005A_N 6190,6505 r0 top
U2 "TPS73218DBVT" DBV0005A_N 6190,6005 r0 top
U3 "TPS73218DBVT" DBV0005A_N 6190,7005 r0 top
U4 "TPS73218DBVT" DBV0005A_N 7190,7005 r0 top
U5 "TPS73218DBVT" DBV0005A_N 7190,6505 r0 top
U6 "TPS73218DBVT" DBV0005A_N 7190,6005 r0 top
U7 "TPS73218DBVT" DBV0005A_N 7190,5505 r0 top

## Footprints (in the part's own frame and the unit in brackets; to place one, negate y for a bottom-side part, rotate by r counter-clockwise, add the part's x,y. Pads: shape width x height; smd on the part's side, far side on the other; paste and mask are expansions set on the pad)
CAPC1608X90X35ML10T15#1 [mm] "Chip Capacitor, 2-Leads, Body 1.7x0.9mm, IPC Low Density"
  rect 0.95x1.05 smd: 1(-0.725,0) 2(0.725,0)
  body extent -0.85,-0.45 0.85,0.45, height 0.9
CAPC1608X90X35ML10T15#2 [mm] "Chip Capacitor, 2-Leads, Body 1.7x0.9mm, IPC Low Density"
  rect 0.95x1.05 smd: 1(-0.725,0)
  rect 1.05x0.95 smd: 2(0.725,0)
  body extent -0.85,-0.45 0.85,0.45, height 0.9
CornerMount#1 [mil] "Ideally grounded mounting hole for board corners. 150mil distance."
  round 200 hole 100: 1(0,0)
CornerMount#2 [mil] "Ideally grounded mounting hole for board corners. 150mil distance."
  round 200 hole 100: 1(-3510,7230)
DBV0005A_N [mm] "SOT23, 5-Leads, Body 3.05x1.75mm, Pitch 0.95mm, IPC Medium Density"
  rrect17% 1x0.6 smd: 1(-1.375,0.95) 2(-1.375,0) 3(-1.375,-0.95) 4(1.375,-0.95) 5(1.375,0.95)
  silkscreen extent -1.5,-1.55 0.5,1.92, body extent -1.42,-1.46 1.42,1.46, height 1.08
HDR1X2 [mm] "Connector; Header; 2 Position"
  rect 1.5x1.5 hole 0.9: 1(0,0)
  round 1.5 hole 0.9: 2(2.54,0)
  silkscreen extent -1.27,-1.27 3.81,1.27
HDR1X6 [mm] "Connector; Header; 6 Position"
  rect 1.5x1.5 hole 0.9: 1(0,0)
  round 1.5 hole 0.9: 2(2.54,0) 3(5.08,0) 4(7.62,0) 5(10.16,0) 6(12.7,0)
  silkscreen extent -1.27,-1.27 13.97,1.27
HDR1X24 [mm] "Connector; Header; 24 Position"
  rect 1.5x1.5 hole 0.9: 1(0,0)
  round 1.5 hole 0.9: 2(2.54,0) 3(5.08,0) 4(7.62,0) 5(10.16,0) 6(12.7,0) 7(15.24,0) 8(17.78,0) 9(20.32,0) 10(22.86,0) 11(25.4,0) 12(27.94,0) 13(30.48,0) 14(33.02,0) 15(35.56,0) 16(38.1,0) 17(40.64,0) 18(43.18,0) 19(45.72,0) 20(48.26,0) 21(50.8,0) 22(53.34,0) 23(55.88,0) 24(58.42,0)
  silkscreen extent -1.27,-1.27 59.69,1.27
Header1 [mm] "Single header connection"
  round 1.5 hole 0.9 mask+0.056: 1(0,0)
  silkscreen extent -1.25,-1.25 1.25,1.25
ONSC-SOD-123-2-425-04_V [mm] "SOD, 2-Leads, Body 2.69x1.6mm"
  rect 0.91x1.22 smd: 1(-1.635,0) 2(1.635,0)
  silkscreen extent -1.76,-0.8 0.78,1.28, body extent -1.35,-0.8 1.35,0.8, height 1.35
QFN50P800X800X80_HS-57N_WIDEVIAS [mm] "QFN, 56-Leads, Body 8.00x8.00mm, Pitch 0.50mm, Thermal Pad 5.94x5.94mm, IPC Medium Density"
  oval 0.75x0.25 smd: 1(-3.95,3.25) 2(-3.95,2.75) 3(-3.95,2.25) 4(-3.95,1.75) 5(-3.95,1.25) 6(-3.95,0.75) 7(-3.95,0.25) 8(-3.95,-0.25) 9(-3.95,-0.75) 10(-3.95,-1.25) 11(-3.95,-1.75) 12(-3.95,-2.25) 13(-3.95,-2.75) 14(-3.95,-3.25) 29(3.95,-3.25) 30(3.95,-2.75) 31(3.95,-2.25) 32(3.95,-1.75) 33(3.95,-1.25) 34(3.95,-0.75) 35(3.95,-0.25) 36(3.95,0.25) 37(3.95,0.75) 38(3.95,1.25) 39(3.95,1.75) 40(3.95,2.25) 41(3.95,2.75) 42(3.95,3.25)
  oval 0.25x0.75 smd: 15(-3.25,-3.95) 16(-2.75,-3.95) 17(-2.25,-3.95) 18(-1.75,-3.95) 19(-1.25,-3.95) 20(-0.75,-3.95) 21(-0.25,-3.95) 22(0.25,-3.95) 23(0.75,-3.95) 24(1.25,-3.95) 25(1.75,-3.95) 26(2.25,-3.95) 27(2.75,-3.95) 28(3.25,-3.95) 43(3.25,3.95) 44(2.75,3.95) 45(2.25,3.95) 46(1.75,3.95) 47(1.25,3.95) 48(0.75,3.95) 49(0.25,3.95) 50(-0.25,3.95) 51(-0.75,3.95) 52(-1.25,3.95) 53(-1.75,3.95) 54(-2.25,3.95) 55(-2.75,3.95) 56(-3.25,3.95)
  rect 5.94x5.94 smd: 57(0,0)
  silkscreen extent -4.93,-4.15 4.15,4.15, body extent -4,-4 4,4, height 0.8
RESC1609X50X30NL8T20 [mm] "Chip Resistor, 2-Leads, Body 1.65x0.95mm, IPC Medium Density"
  rect 0.8x0.95 smd: 1(-0.65,0) 2(0.65,0)
  body extent -0.82,-0.48 0.82,0.48, height 0.5
SOIC127P600X175-16N [mm]
  rect 1.525x0.65 smd: 1(-2.712,4.445) 2(-2.712,3.175) 3(-2.712,1.905) 4(-2.712,0.635) 5(-2.712,-0.635) 6(-2.712,-1.905) 7(-2.712,-3.175) 8(-2.712,-4.445) 9(2.712,-4.445) 10(2.712,-3.175) 11(2.712,-1.905) 12(2.712,-0.635) 13(2.712,0.635) 14(2.712,1.905) 15(2.712,3.175) 16(2.712,4.445)
  silkscreen extent -3.47,-4.95 1.6,5.12, body extent -3.01,-4.94 3.01,4.96, height 1.75
SOIC127P780X200-14N [mm]
  rect 1.825x0.7 smd: 1(-3.562,3.81) 2(-3.562,2.54) 3(-3.562,1.27) 4(-3.562,0) 5(-3.562,-1.27) 6(-3.562,-2.54) 7(-3.562,-3.81) 8(3.562,-3.81) 9(3.562,-2.54) 10(3.562,-1.27) 11(3.562,0) 12(3.562,1.27) 13(3.562,2.54) 14(3.562,3.81)
  silkscreen extent -4.47,-5.1 2.3,5.1, body extent -3.9,-5.1 3.9,5.1, height 2
SOP50P310X90-8N [mm]
  rect 0.85x0.3 smd: 1(-1.575,0.75) 2(-1.575,0.25) 3(-1.575,-0.25) 4(-1.575,-0.75) 5(1.575,-0.75) 6(1.575,-0.25) 7(1.575,0.25) 8(1.575,0.75)
  silkscreen extent -2,-1 0.8,1.25, body extent -1.55,-1 1.55,1, height 0.9
SOP65P640X110-16N [mm]
  rect 1.475x0.45 smd: 1(-2.938,2.275) 2(-2.938,1.625) 3(-2.938,0.975) 4(-2.938,0.325) 5(-2.938,-0.325) 6(-2.938,-0.975) 7(-2.938,-1.625) 8(-2.938,-2.275) 9(2.938,-2.275) 10(2.938,-1.625) 11(2.938,-0.975) 12(2.938,-0.325) 13(2.938,0.325) 14(2.938,0.975) 15(2.938,1.625) 16(2.938,2.275)
  silkscreen extent -3.67,-2.5 1.85,2.85, body extent -3.2,-2.5 3.2,2.5, height 1.1
SOP65P640X120-14N [mm]
  rect 1.475x0.45 smd: 1(-2.938,1.95) 2(-2.938,1.3) 3(-2.938,0.65) 4(-2.938,0) 5(-2.938,-0.65) 6(-2.938,-1.3) 7(-2.938,-1.95) 8(2.938,-1.95) 9(2.938,-1.3) 10(2.938,-0.65) 11(2.938,0) 12(2.938,0.65) 13(2.938,1.3) 14(2.938,1.95)
  silkscreen extent -3.68,-2.5 1.85,2.53, body extent -3.2,-2.5 3.2,2.5, height 1.13
SOT95P280X145-6N [mm]
  rect 1.2x0.6 smd: 1(-1.25,0.95) 2(-1.25,0) 3(-1.25,-0.95) 4(1.25,-0.95) 5(1.25,0) 6(1.25,0.95)
  silkscreen extent -1.85,-1.45 0.3,1.6, body extent -1.4,-1.45 1.4,1.45, height 1.2
TECO-5-1814832-1_V [mm] "THD, 5-Leads, Body 6.4x6.4mm, Pitch 5.08mm"
  round 2 hole 1.5: 1(0,0)
  round 2.1 hole 1.6: 2(-2.54,2.54) 3(-2.54,-2.54) 4(2.54,-2.54) 5(2.54,2.54)
  silkscreen extent -3.2,-3.2 3.2,3.2, body extent -3.21,-3.21 3.19,3.19, height 9.5
TEENSY_3.5/3.6 [mil]
  round 58 / inner round 60 / far side round 58 hole 38: 0/RX(-1000,-300) 1/TX(-900,-300) 2(-800,-300) 3/CANTX(-700,-300) 3V3(300,-300) 3V3_2(700,-100) 3V3_LO(-900,300) 4/CANRX(-600,-300) 5(-500,-300) 6(-400,-300) 7(-300,-300) 8(-200,-300) 9/CS(-100,-300) 10/CS(0,-300) 11/MOSI(100,-300) 12/MISO(200,-300) 13/SCK(200,300) 14/A0(100,300) 15/A1(0,300) 16/A2(-100,300) 17/A3(-200,300) 18/A4/SDA(-300,300) 19/A5/SCL(-400,300) 20/A6(-500,300) 21/A7(-600,300) 21/DAC0(500,300) 22/A8(-700,300) 23/A9(-800,300) 24(400,-300) 25(500,-300) 26(600,-300) 27(700,-300) 28(800,-300) 29(900,-300) 30(1000,-300) 31/A12(1100,-300) 32/A13(1200,-300) 33/A14(1200,300) 34/A15(1100,300) 35/A16(1000,300) 36/A17(900,300) 37/A18(800,300) 38/A19(700,300) 39/A20(600,300) A10(-700,200) A11(-600,200) A22/DAC1(400,300) AGND(-1000,300) AREF(-800,200) GND(-1100,-300) GND2(300,300) GND3(700,0) PROG(700,100) RESET(700,200) U5V(-850,-175) UD+(-650,-175) UD-(-750,-175) UGND1(-550,-175) UGND2(-450,-175) VBAT(700,-200) VIN(-1100,300) VUSB(-1000,200)

## Part data
C1 C2 C3 C4 C5 C6 C7 C8 C9 C10 C11 C12 C13 C14 C15 C16 C17 C18 C19 C20 C21 C22 C23 C24 C25 C26 C27 C28 C29 C30 C31 C32 C33 C34 C35 C36 C37 C38 C39 C40 C41 C42 C43 C44 C45 C46 C47 C48 C49 C50 C51 C52 C53 C54 C55 C56 C57 C58 C59 C60 C61 C62 C63 C64 C65 C66 C67 C68 C69 C70 C71 C72 C73 C74 C75 C76 C77 C78 C79 C80 C81 C82 C83 C84 C85 C86 C87 C88 C89 C90 C91 C92 C93 C94 C95 C96 C97 C98 C99 C100 C101 C102 C103 C104 C105 C106 C107 C108 C109 C110 C111 C112 C113 C114 C115 C116: library part CMP-2000-04945-1, "0603", Capacitance=22pF, Dielectric=C0G, Manufacturer=Murata, Package Description="2-Pin Surface Mount Device, Body 1.6 x 0.8 mm", Package Reference=603, Rated Voltage=50V, Tolerance (%)=±5%, Case Size/Dimension=0603, Datasheet URL=https://datasheet.ciiva.com/11786/0900766b807a1cab-11786398.pdf, Datasheet Version=Jul-06, Manufacturer URL=http://www.murata.com/
D1 D2 D3 D4: library part CMP-1060-00509-1, "Zener Voltage Regulator, 2-Pin SOD-123, Pb-Free, Tape and Reel", Manufacturer="On Semiconductor", PartNumber=MMSZ4679T1G, ComponentLink1Description="Manufacturer URL", ComponentLink1URL=http://www.onsemi.com/, ComponentLink2Description=Datasheet, ComponentLink2URL=http://www.onsemi.com/pub_link/Collateral/MMSZ4678T1-D.PDF, ComponentLink3Description="Package Specification", ComponentLink3URL=http://www.onsemi.com/pub_link/Collateral/425-04.PDF, DatasheetVersion="Rev. 9", Mounting Technology="Surface Mount", P Max (W)=0.5, PackageDescription="2-Pin SOD, Body 1.6 x 2.69 mm", PackageReference=SOD-123-2-425-04, PackageVersion="Rev. G, 10/2009", Packing="Tape and Reel", RoHS=Pb-Free, VZ Typ (V)=2
IC1 IC3 IC4 IC5 IC6 IC7 IC10 IC12 IC13 IC14 IC15 IC16: "Flip Flops 1.65-5.5V CMOS Single D-Type", Manufacturer_Name="ON Semiconductor", Datasheet Link=http://www.onsemi.com/pub/Collateral/NL17SZ74-D.PDF, Height=0.9mm, Manufacturer_Part_Number=NL17SZ74USG
IC2 IC11 IC19: "Integrated Circuit", Manufacturer_Name="Maxim Integrated", Datasheet Link=https://pdfserv.maximintegrated.com/en/ds/MAX13000E-MAX13005E.pdf, Height=1.1mm, Manufacturer_Part_Number=MAX13003EEUE+
IC8 IC9 IC17 IC18 IC20 IC21: "Integrated Circuit", Manufacturer_Name="Texas Instruments", Datasheet Link=http://www.ti.com/lit/gpn/tdc7200, Height=1.2mm, Manufacturer_Part_Number=TDC7200PWR
IC22 IC23 IC24 IC41: "Encoders, Decoders, Multiplexers & Demultiplexers Dual 4-Input", Manufacturer_Name="Texas Instruments", Mouser Part Number=595-CD74AC153M96, Arrow Part Number=CD74AC153M96, Arrow Price/Stock=https://www.arrow.com/en/products/cd74ac153m96/texas-instruments, Datasheet Link=https://www.ti.com/lit/ds/symlink/cd74ac153.pdf?ts=1617785711495&ref_url=https%253A%252F%252Fwww.ti.com%252Fstore%252Fti%252Fen%252Fp%252Fproduct%252F%253Fp%253DCD74AC153M96, Height=1.75mm, Manufacturer_Part_Number=CD74AC153M96, Mouser Price/Stock=https://www.mouser.co.uk/ProductDetail/Texas-Instruments/CD74AC153M96?qs=bkMXpVdiF41Yiv9m4vuwDg%3D%3D
IC25 IC26 IC27 IC28 IC30 IC32 IC33 IC34 IC36 IC37 IC38 IC39 IC40 IC42 IC43: "Encoders, Decoders, Multiplexers & Demultiplexers 1 of 2 Decoder DeMultxe", Manufacturer_Name="Texas Instruments", Mouser Part Number=595-SN74AUC1G19DBVR, Datasheet Link=http://www.ti.com/lit/gpn/sn74auc1g19, Height=1.45mm, Manufacturer_Part_Number=SN74AUC1G19DBVR, Mouser Price/Stock=https://www.mouser.com/Search/Refine.aspx?Keyword=595-SN74AUC1G19DBVR
IC29 IC31 IC35: "Inverters Hex Inverter", Manufacturer_Name="Texas Instruments", Mouser Part Number=595-SN74LVC04ANS, Datasheet Link=http://www.ti.com/lit/ds/symlink/sn74lvc04a.pdf, Height=2mm, Manufacturer_Part_Number=SN74LVC04ANS, Mouser Price/Stock=https://www.mouser.co.uk/ProductDetail/Texas-Instruments/SN74LVC04ANS?qs=4%2FQr8XCwynNuUCMn78xqww%3D%3D
J1 J2 J3 J4 J5 J6 J7 J8 J9 J10 J11 J12 J13 J14: library part CMP-2000-05415-1, "SMA Connector, Pitch 5.08 mm, 1 Position, Height 9.5 mm, Tail Length 4 mm, -65 to 165 degC, RoHS, Bulk", Frequency Max=3GHz, Manufacturer="TE Connectivity", Package Description="SMA Connector, Pitch 5.08 mm, 1 Position, Height 9.5 mm, Tail Length 4 mm", Coaxial Cable Types=-, Coaxial Termination=Solder, Connector Body Style=StraightJack, Connector Mounting=PCBMount, Connector Type=SMACoaxial, Contact Material=BerylliumCopper, Contact Plating=GoldPlatedContacts, Datasheet URL=http://www.onlinecomponents.com/productFiles/mf-AMP/eng_cd_1814832_a.pdf, Datasheet Version="Rev. B1, 03/2011", Impedance=50ohm, Manufacturer URL=http://www.te.com/, Package Reference=5-1814832-1, Product Range=ZDCSeries, SVHC=NoSVHC(15-Jun-2015)
P1 P2 P3 P4 P5 P6 P7 P8 P9 P10 P11 P12 P13 P14 P15 P16 P17 P18 P19 P20 P21 P22 P29 P30 P31 P32 P33 P34 P35 P36 P37 P38 P39 P40 P41 P42 P45 P46 P47 P48: "Header, 2-Pin", LatestRevisionDate=17-Jul-2002, LatestRevisionNote="Re-released for DXP Platform.", Publisher="Altium Limited"
P23 P26: "Header, 6-Pin", LatestRevisionDate=17-Jul-2002, LatestRevisionNote="Re-released for DXP Platform.", Publisher="Altium Limited"
P43 P44: "Header, 24-Pin", LatestRevisionDate=17-Jul-2002, LatestRevisionNote="Re-released for DXP Platform.", Publisher="Altium Limited"
R1 R2 R3 R4 R5 R6 R7 R8 R9 R10 R11 R12 R13 R14 R15 R16 R17 R18 R19 R20 R21 R22 R23 R24: library part CMP-2000-03816-5, "0603", Manufacturer="Vishay Semiconductor", Max Operating Temperature="155 degC", Min Operating Temperature="-55 degC", Package Quantity=5000, Voltage Rating="75 V", ComponentLink1Description="Manufacturer URL", ComponentLink1URL=http://www.vishay.com/, ComponentLink2Description=Datasheet, ComponentLink2URL=http://www.vishay.com/docs/20035/dcrcwe3.pdf, DatasheetVersion=06/2012, Height="0.45 mm", Length="1.55 mm", Mount="Surface Mount", Mounting Technology="Surface Mount", PackageDescription="2-Pin Surface Mount Device, Body 1.575 x 0.85 mm", PackageReference=0603, Packaging="Tape and Reel", Pins=2, REACH SVHC=Unknown, RoHSCompliant=true
U1 U2 U3 U4 U5 U6 U7: library part CMP-0394-00378-2, "Single Output Fast Transient Response LDO, 200 mA, Fixed 1.8 V Output, 1.7 to 5.5 V Input, with Reverse Current Protection, 5-pin SOT-23 (DBV), -40 to 85 degC, Green (RoHS & no Sb/Br)", Manufacturer="Texas Instruments", Accuracy(%)=1, Code_JEDEC=MO-178, ComponentLink1Description="Manufacturer URL", ComponentLink1URL=http://www.ti.com/, ComponentLink2Description=Datasheet, ComponentLink2URL=http://www.ti.com/general/docs/lit/getliterature.tsp?genericPartNumber=TPS73218&fileType=pdf, ComponentLink3Description="Package Specification", ComponentLink3URL=http://www.ti.com/litv/pdf/mpds018i, DatasheetVersion=SBVS037O, Eco-Plan="Green (RoHS & no Sb/Br)", Fixed Output Options(V)=1.8, Iout(Max)(A)=0.25, Iq(Typ)(mA)=0.4, Mounting Technology="Surface Mount", PackageDescription="5-Pin Plastic Small Outline, Body 1.60 Ãƒâ€” 2.90 mm, Pitch 0.95 mm", PackageReference=DBV0005A, PackageVersion=4073253-4/K, PartNumber=TPS73218DBVT, SubFamily="Single Channel LDO", Vdo(Typ)(mV)=40, Vin(Max)(V)=5.5, Vin(Min)(V)=1.7, Vout Adj(Max)(V)=1.8, Vout Adj(Min)(V)=1.8
TEENSY1: DeviceSetName=TEENSY_3.5/3.6, GateName_1=G$1, LibraryName=Teensy356, Package=TEENSY_3.5/3.6, SymbolName_1=TEENSY_3.5/3.6

## Via types
v1: diameter 25, hole 15, Top Layer to Bottom Layer, 50 vias

## Nets (pads, with @x,y where several pads share a name; then routed paths per layer and width w, separated by ;. In a path a pad name is that pad's centre, name@x,y a point inside that pad or via, vN(x,y) a via of type N, cw(c..) or ccw(c..) an arc to the next point about the centre after c; other vN are vias at no path point)
+1.8VA: C2.1 C24.2 C54.2 D1.1 D3.1 P4.2 U1.5
+1.8VD: C4.1 C22.2 C23.2 C25.2 C28.2 C29.2 C30.2 C31.2 C52.2 C53.2 C55.2 C58.2 C59.2 C60.2 C61.2 C106.1 C107.1 C109.1 C110.1 C113.1 C116.1 IC1.2 IC1.7 IC1.8 IC2.4 IC2.5 IC3.2 IC3.7 IC3.8 IC4.2 IC4.7 IC4.8 IC5.2 IC5.7 IC5.8 IC6.2 IC6.7 IC6.8 IC7.2 IC7.7 IC7.8 IC10.2 IC10.7 IC10.8 IC11.4 IC11.5 IC12.2 IC12.7 IC12.8 IC13.2 IC13.7 IC13.8 IC14.2 IC14.7 IC14.8 IC15.2 IC15.7 IC15.8 IC16.2 IC16.7 IC16.8 IC34.5 IC35.14 IC37.5 IC38.5 IC41.16 IC43.5 P5.2 U2.5
+1.8VD_SHIFT: C6.1 C84.1 IC19.4 IC19.5 P6.2 U3.5
+1.8VDDAON: C17.1 P17.1 P19.1 U6.5
+1.8VDDMAIN: C11.1 P8.1 P12.1 U4.5
+1.8VDDSMALL: C13.1 P10.1 P14.1 U5.5
+1.8VDDTEST: C19.1 P21.1 U7.5
+1.8VPSU: P4.1 P5.1 P6.1 P9.2 P11.2 P13.2 P15.2 P18.2 P20.2 P22.2
+3.3VA: C1.1 P1.2 U1.1 U1.3
+3.3VCHIP: C10.1 C12.1 C16.1 C18.1 P16.2 U4.1 U4.3 U5.1 U5.3 U6.1 U6.3 U7.1 U7.3
+3.3VD: C3.1 C32.1 C33.1 C35.1 C36.1 C62.1 C63.1 C65.1 C66.1 C87.1 C88.1 C89.1 C90.1 C91.1 C93.1 C95.1 C97.1 C98.1 C99.1 C100.1 C101.1 C102.1 C103.1 C104.1 C105.1 C108.1 C111.1 C112.1 C115.1 IC8.14 IC9.14 IC17.14 IC18.14 IC20.14 IC21.14 IC22.16 IC23.16 IC24.16 IC25.5 IC26.5 IC27.5 IC28.5 IC29.14 IC30.5 IC31.14 IC32.5 IC33.5 IC36.5 IC39.5 IC40.5 IC42.5 P2.2 U2.1 U2.3
+3.3VD_SHIFT: C5.1 C26.2 C27.2 C56.2 C57.2 C82.2 C83.2 IC2.13 IC11.13 IC19.13 P3.2 U3.1 U3.3
+3.3VPSU: P1.1 P2.1 P3.1 P7.1 P16.1
GND: C1.2 C2.2 C3.2 C4.2 C5.2 C6.2 C7.2 C8.2 C9.2 C10.2 C11.2 C12.2 C13.2 C14.2 C15.2 C16.2 C17.2 C18.2 C19.2 C20.2 C21.2 C22.1 C23.1 C24.1 C25.1 C26.1 C27.1 C28.1 C29.1 C30.1 C31.1 C32.2 C33.2 C34.2 C35.2 C36.2 C37.2 C38.1 C39.1 C40.1 C41.1 C42.1 C43.1 C44.1 C45.1 C46.1 C47.1 C48.1 C49.1 C50.1 C51.1 C52.1 C53.1 C54.1 C55.1 C56.1 C57.1 C58.1 C59.1 C60.1 C61.1 C62.2 C63.2 C64.2 C65.2 C66.2 C67.2 C68.1 C69.1 C70.1 C71.1 C72.1 C73.1 C74.1 C75.1 C76.1 C77.1 C78.1 C79.1 C80.1 C81.1 C82.1 C83.1 C84.2 C85.2 C86.2 C87.2 C88.2 C89.2 C90.2 C91.2 C92.2 C93.2 C94.2 C95.2 C96.2 C97.2 C98.2 C99.2 C100.2 C101.2 C102.2 C103.2 C104.2 C105.2 C106.2 C107.2 C108.2 C109.2 C110.2 C111.2 C112.2 C113.2 C114.2 C115.2 C116.2 CORNER1.1 CORNER2.1 CORNER3.1 CORNER4.1 D2.2 D4.2 DUT_A1.2 DUT_A1.14 DUT_A1.15 DUT_A1.22 DUT_A1.28 DUT_A1.35 DUT_A1.41 DUT_A1.47 DUT_B1.2 DUT_B1.14 DUT_B1.15 DUT_B1.22 DUT_B1.28 DUT_B1.35 DUT_B1.41 DUT_B1.47 IC1.4 IC2.12 IC3.4 IC4.4 IC5.4 IC6.4 IC7.4 IC8.7 IC9.7 IC10.4 IC11.12 IC12.4 IC13.4 IC14.4 IC15.4 IC16.4 IC17.7 IC18.7 IC19.12 IC20.7 IC21.7 IC22.1 IC22.8 IC23.1 IC23.8 IC24.1 IC24.8 IC25.2 IC26.2 IC27.2 IC28.2 IC29.7 IC30.2 IC31.7 IC32.2 IC33.2 IC34.2 IC35.5 IC35.7 IC35.9 IC35.11 IC35.13 IC36.2 IC37.2 IC38.2 IC39.2 IC40.2 IC41.1 IC41.8 IC41.10 IC41.11 IC41.12 IC41.13 IC42.2 IC43.2 J1.2 J1.3 J1.4 J1.5 J2.2 J2.3 J2.4 J2.5 J3.2 J3.3 J3.4 J3.5 J4.2 J4.3 J4.4 J4.5 J5.2 J5.3 J5.4 J5.5 J6.2 J6.3 J6.4 J6.5 J7.2 J7.3 J7.4 J7.5 J8.2 J8.3 J8.4 J8.5 J9.2 J9.3 J9.4 J9.5 J10.2 J10.3 J10.4 J10.5 J11.2 J11.3 J11.4 J11.5 J12.2 J12.3 J12.4 J12.5 J13.2 J13.3 J13.4 J13.5 J14.2 J14.3 J14.4 J14.5 P43.1 P44.2 P44.15 R1.1 R2.1 R3.1 R4.1 R5.1 R6.1 R7.1 R10.1 R11.1 R12.1 R13.1 R14.1 R15.1 R16.1 TEENSY1.AGND TEENSY1.GND TEENSY1.GND2 U1.2 U2.2 U3.2 U4.2 U5.2 U6.2 U7.2
IIN_A: DUT_A1.20 J1.1 R1.2
IIN_B: DUT_B1.20 J8.1 R10.2
NetC7_1: C7.1 U1.4
NetC8_1: C8.1 U2.4
NetC9_1: C9.1 U3.4
NetC14_1: C14.1 U4.4
NetC15_1: C15.1 U5.4
NetC20_1: C20.1 U6.4
NetC21_1: C21.1 U7.4
NetC34_1: C34.1 IC8.13
NetC37_1: C37.1 IC9.13
NetC64_1: C64.1 IC17.13
NetC67_1: C67.1 IC18.13
NetC85_1: C85.1 IC20.13
NetC86_1: C86.1 IC21.13
NetC92_1: C92.1 IC22.15
NetC94_1: C94.1 IC23.15
NetC96_1: C96.1 IC24.15
NetC114_1: C114.1 IC41.15
NetIC8_3: IC8.3 R8.2
NetIC9_3: IC9.3 R9.2
NetIC17_3: IC17.3 R17.2
NetIC18_3: IC18.3 R18.2
OUT_CFD_MAIN_LATCH_18_A: IC2.2 IC3.5
OUT_CFD_MAIN_LATCH_18_B: IC11.2 IC12.5
OUT_CFD_MAIN_LATCH_33_A: IC2.15 P23.2
OUT_CFD_MAIN_LATCH_33_B: IC11.15 P26.2
OUT_CFD_MAIN_LV_A: DUT_A1.11 IC3.1
OUT_CFD_MAIN_LV_B: DUT_B1.11 IC12.1
OUT_CFD_SMALL_LATCH_18_A: IC2.6 IC5.5
OUT_CFD_SMALL_LATCH_18_B: IC11.6 IC14.5
OUT_CFD_SMALL_LATCH_33_A: IC2.11 P23.4
OUT_CFD_SMALL_LATCH_33_B: IC11.11 P26.4
OUT_CFD_SMALL_LV_A: DUT_A1.3 IC5.1
OUT_CFD_SMALL_LV_B: DUT_B1.3 IC14.1
OUT_LED_MAIN_LATCH_18_A: IC1.5 IC2.1
OUT_LED_MAIN_LATCH_18_B: IC10.5 IC11.1
OUT_LED_MAIN_LATCH_33_A: IC2.16 P23.1
OUT_LED_MAIN_LATCH_33_B: IC11.16 P26.1
OUT_LED_MAIN_LV_A: DUT_A1.12 IC1.1
OUT_LED_MAIN_LV_B: DUT_B1.12 IC10.1
OUT_LED_SMALL_LATCH_18_A: IC2.3 IC4.5
OUT_LED_SMALL_LATCH_18_B: IC11.3 IC13.5
OUT_LED_SMALL_LATCH_33_A: IC2.14 P23.3
OUT_LED_SMALL_LATCH_33_B: IC11.14 P26.3
OUT_LED_SMALL_LV_A: DUT_A1.4 IC4.1
OUT_LED_SMALL_LV_B: DUT_B1.4 IC13.1
OUT_MAIN_HV_A: DUT_A1.18 IC8.4 IC20.3
OUT_MAIN_HV_B: DUT_B1.18 IC17.4 IC20.4
OUT_MAIN_LATCH_18_A: IC2.7 IC6.5
OUT_MAIN_LATCH_18_B: IC11.7 IC15.5
OUT_MAIN_LATCH_33_A: IC2.10 P23.5
OUT_MAIN_LATCH_33_B: IC11.10 P26.5
OUT_MAIN_LV_A: DUT_A1.17 IC6.1
OUT_MAIN_LV_B: DUT_B1.17 IC15.1
OUT_SMALL_HV_A: DUT_A1.5 IC9.4 IC21.3
OUT_SMALL_HV_B: DUT_B1.5 IC18.4 IC21.4
OUT_SMALL_LATCH_18_A: IC2.8 IC7.5
OUT_SMALL_LATCH_18_B: IC11.8 IC16.5
OUT_SMALL_LATCH_33_A: IC2.9 P23.6
OUT_SMALL_LATCH_33_B: IC11.9 P26.6
OUT_SMALL_LV_A: DUT_A1.6 IC7.1
OUT_SMALL_LV_B: DUT_B1.6 IC16.1
RST_PK_TEST_33: IC19.9 P43.21 TEENSY1.29
RST_PK_TEST_A: DUT_A1.38 DUT_B1.38 IC19.8
RSTb_RETIME: IC38.3 P43.16 TEENSY1.24
RSTb_RETIME_A: IC1.6 IC3.6 IC4.6 IC5.6 IC6.6 IC7.6 IC38.6
RSTb_RETIME_B: IC10.6 IC12.6 IC13.6 IC14.6 IC15.6 IC16.6 IC38.4
SCAN_CLK_A: DUT_A1.56 IC35.2
SCAN_CLK_B: DUT_B1.56 IC35.4
SCAN_CLKb: IC19.3 IC37.3
SCAN_CLKb_33: IC19.14 P43.18 TEENSY1.26
SCAN_CLKb_A: IC35.1 IC37.6
SCAN_CLKb_B: IC35.3 IC37.4
SCAN_INb_33: IC19.10 P43.20 TEENSY1.28
SCAN_INb_A: DUT_A1.43 DUT_B1.43 IC19.7
SCAN_LOADb: IC19.6 IC34.3
SCAN_LOADb_33: IC19.11 P43.19 TEENSY1.27
SCAN_LOADb_A: DUT_A1.44 IC34.6
SCAN_LOADb_B: DUT_B1.44 IC34.4
SCAN_OUTb: IC19.2 IC41.7
SCAN_OUTb_33: IC19.15 P43.17 TEENSY1.25
SCAN_OUTb_A: DUT_A1.1 IC41.5 IC41.6
SCAN_OUTb_B: DUT_B1.1 IC41.3 IC41.4
SEL_CHAIN: IC22.14 IC23.14 IC24.14 IC25.1 IC26.1 IC27.1 IC32.1 IC39.1 IC41.14 IC43.1
SEL_CHIP: IC22.2 IC23.2 IC24.2 IC28.1 IC30.1 IC33.1 IC34.1 IC36.1 IC37.1 IC38.1 IC40.1 IC41.2 IC42.1
SPI_CLK_MAIN_A: IC8.12 IC29.2
SPI_CLK_MAIN_B: IC17.12 IC29.4
SPI_CLK_MAIN_DUAL: IC20.12 IC31.2
SPI_CLK_SMALL_A: IC9.12 IC29.6
SPI_CLK_SMALL_B: IC18.12 IC29.8
SPI_CLK_SMALL_DUAL: IC21.12 IC31.4
SPI_CLKb_DUAL: IC25.3 P43.7 TEENSY1.5
SPI_CLKb_MAIN_A: IC29.1 IC40.6
SPI_CLKb_MAIN_B: IC29.3 IC40.4
SPI_CLKb_MAIN_DUAL: IC25.6 IC31.1
SPI_CLKb_MAIN_SINGLE: IC39.6 IC40.3
SPI_CLKb_SINGLE: IC39.3 P43.8 TEENSY1.6
SPI_CLKb_SMALL_A: IC29.5 IC42.6
SPI_CLKb_SMALL_B: IC29.9 IC42.4
SPI_CLKb_SMALL_DUAL: IC25.4 IC31.3
SPI_CLKb_SMALL_SINGLE: IC39.4 IC42.3
SPI_CSb_DUAL: IC26.3 P43.9 TEENSY1.7
SPI_CSb_MAIN_A: IC8.11 IC28.6
SPI_CSb_MAIN_B: IC17.11 IC28.4
SPI_CSb_MAIN_DUAL: IC20.11 IC26.6
SPI_CSb_MAIN_SINGLE: IC27.6 IC28.3
SPI_CSb_SINGLE: IC27.3 P43.10 TEENSY1.8
SPI_CSb_SMALL_A: IC9.11 IC30.6
SPI_CSb_SMALL_B: IC18.11 IC30.4
SPI_CSb_SMALL_DUAL: IC21.11 IC26.4
SPI_CSb_SMALL_SINGLE: IC27.4 IC30.3
SPI_DIN: R19.2 R20.2 R21.2 R22.2 R23.2 R24.2 TEENSY1.32/A13
SPI_DIN_MAIN_DUAL: IC20.10 R19.1
SPI_DIN_MAIN_SINGLE_A: IC8.10 R21.1
SPI_DIN_MAIN_SINGLE_B: IC17.10 R22.1
SPI_DIN_SMALL_DUAL: IC21.10 R20.1
SPI_DIN_SMALL_SINGLE_A: IC9.10 R23.1
SPI_DIN_SMALL_SINGLE_B: IC18.10 R24.1
SPI_DOUT_DUAL: IC24.7 P43.11 TEENSY1.9/CS
SPI_DOUT_MAIN_A: IC8.9 IC22.10
SPI_DOUT_MAIN_B: IC17.9 IC22.12
SPI_DOUT_MAIN_DUAL: IC20.9 IC24.4 IC24.6
SPI_DOUT_SINGLE: IC22.9 P43.12 TEENSY1.10/CS
SPI_DOUT_SMALL_A: IC9.9 IC22.11
SPI_DOUT_SMALL_B: IC18.9 IC22.13
SPI_DOUT_SMALL_DUAL: IC21.9 IC24.3 IC24.5
TDC_CLK: IC8.5 IC9.5 IC17.5 IC18.5 IC20.5 IC21.5 TEENSY1.31/A12
TDC_EN_MAIN_A: IC8.1 IC31.6
TDC_EN_MAIN_B: IC17.1 IC31.8
TDC_EN_MAIN_DUAL: IC20.1 IC29.10
TDC_EN_SMALL_A: IC9.1 IC31.10
TDC_EN_SMALL_B: IC18.1 IC31.12
TDC_EN_SMALL_DUAL: IC21.1 IC29.12
TDC_ENb_DUAL: IC43.3 P43.13 TEENSY1.11/MOSI
TDC_ENb_MAIN_A: IC31.5 IC33.6
TDC_ENb_MAIN_B: IC31.9 IC33.4
TDC_ENb_MAIN_DUAL: IC29.11 IC43.6
TDC_ENb_MAIN_SINGLE: IC32.6 IC33.3
TDC_ENb_SINGLE: IC32.3 P43.14 TEENSY1.12/MISO
TDC_ENb_SMALL_A: IC31.11 IC36.6
TDC_ENb_SMALL_B: IC31.13 IC36.4
TDC_ENb_SMALL_DUAL: IC29.13 IC43.4
TDC_ENb_SMALL_SINGLE: IC32.4 IC36.3
TDC_INTRb_DUAL: IC24.9 P43.5 TEENSY1.3/CANTX
TDC_INTRb_MAIN_A: IC8.8 IC23.6
TDC_INTRb_MAIN_B: IC17.8 IC23.4
TDC_INTRb_MAIN_DUAL: IC20.8 IC24.10 IC24.12
TDC_INTRb_SINGLE: IC23.7 P43.22 TEENSY1.30
TDC_INTRb_SMALL_A: IC9.8 IC23.5
TDC_INTRb_SMALL_B: IC18.8 IC23.3
TDC_INTRb_SMALL_DUAL: IC21.8 IC24.11 IC24.13
TDC_START_MAIN_A: J6.1 R6.2 R8.1
TDC_START_MAIN_B: J13.1 R15.2 R17.1
TDC_START_SMALL_A: J7.1 R7.2 R9.1
TDC_START_SMALL_B: J14.1 R16.2 R18.1
TDC_TRIGG_DUAL: IC23.9 P43.6 TEENSY1.4/CANRX
TDC_TRIGG_MAIN_A: IC8.2 IC22.6
TDC_TRIGG_MAIN_B: IC17.2 IC22.4
TDC_TRIGG_MAIN_DUAL: IC20.2 IC23.10 IC23.12
TDC_TRIGG_SINGLE: IC22.7 P43.4 TEENSY1.2
TDC_TRIGG_SMALL_A: IC9.2 IC22.5
TDC_TRIGG_SMALL_B: IC18.2 IC22.3
TDC_TRIGG_SMALL_DUAL: IC21.2 IC23.11 IC23.13
VBG_TEST_A: C47.2 DUT_A1.49 P35.2
VBG_TEST_B: C77.2 DUT_B1.49 P38.2
VBG_TEST_I: P35.1 P38.1 P44.5 TEENSY1.22/A8
VDAC_MAIN_A: C49.2 DUT_A1.30 P36.2
VDAC_MAIN_B: C79.2 DUT_B1.30 P39.2
VDAC_MAIN_IO: P36.1 P39.1 P44.7 TEENSY1.20/A6
VDAC_SMALL_A: C48.2 DUT_A1.32 P30.2
VDAC_SMALL_B: C78.2 DUT_B1.32 P33.2
VDAC_SMALL_IO: P30.1 P33.1 P44.6 TEENSY1.21/A7
VDDAON_A: C38.2 C39.2 C40.2 C41.2 DUT_A1.25 DUT_A1.34 DUT_A1.40 DUT_A1.46 P19.2 P20.1 P31.2
VDDAON_B: C68.2 C69.2 C70.2 C71.2 DUT_B1.25 DUT_B1.34 DUT_B1.40 DUT_B1.46 P17.2 P18.1 P34.2
VDDAON_I: P31.1 P34.1 P44.9 TEENSY1.18/A4/SDA
VDDHV: C43.2 C44.2 C45.2 C73.2 C74.2 C75.2 DUT_A1.26 DUT_A1.36 DUT_A1.45 DUT_B1.26 DUT_B1.36 DUT_B1.45 P7.2
VDDMAIN_A: C42.2 DUT_A1.13 P12.2 P13.1 P37.2
VDDMAIN_B: C72.2 DUT_B1.13 P8.2 P9.1 P40.2
VDDMAIN_I: P37.1 P40.1 P44.10 TEENSY1.17/A3
VDDSMALL_A: C46.2 DUT_A1.10 P14.2 P15.1 P42.2
VDDSMALL_B: C76.2 DUT_B1.10 P10.2 P11.1 P46.2
VDDSMALL_I: P42.1 P44.11 P46.1 TEENSY1.16/A2
VDDTEST: DUT_A1.51 DUT_B1.51 P21.2 P22.1
VIN_DELAY_TEST_A: DUT_A1.53 J2.1 R2.2
VIN_DELAY_TEST_B: DUT_B1.53 J9.1 R11.2
VIN_PK_TEST_A: D1.2 D2.1 DUT_A1.52 P24.1
VIN_PK_TEST_B: D3.2 D4.1 DUT_B1.52 P27.1
VINN_ZCD_SMALL_A: DUT_A1.8 J4.1 R4.2
VINN_ZCD_SMALL_B: DUT_B1.8 J11.1 R13.2
VINP_LED_SMALL_A: DUT_A1.9 J3.1 R3.2
VINP_LED_SMALL_B: DUT_B1.9 J10.1 R12.2
VINP_ZCD_SMALL_A: DUT_A1.7 J5.1 R5.2
VINP_ZCD_SMALL_B: DUT_B1.7 J12.1 R14.2
VOUT_DELAY_TEST_A: DUT_A1.54 P25.1
VOUT_DELAY_TEST_B: DUT_B1.54 P28.1
VOUT_PK_TEST_A: DUT_A1.50 P29.2
VOUT_PK_TEST_B: DUT_B1.50 P32.2
VOUT_PK_TEST_I: P29.1 P32.1 P44.4 TEENSY1.23/A9
VREF_ATTEN_MAIN_A: C51.2 DUT_A1.23 P48.1
VREF_ATTEN_MAIN_B: C81.2 DUT_B1.23 P48.2
VREF_PREAMP_A: C50.2 DUT_A1.29 P41.2
VREF_PREAMP_B: C80.2 DUT_B1.29 P45.2
VREF_PREAMP_IO: P41.1 P44.8 P45.1 TEENSY1.19/A5/SCL
VRST_PK_TEST_A: DUT_A1.55 P47.1
VRST_PK_TEST_B: DUT_B1.55 P47.2
pads on no net: DUT_A1.16 DUT_A1.19 DUT_A1.21 DUT_A1.24 DUT_A1.27 DUT_A1.31 DUT_A1.33 DUT_A1.37 DUT_A1.39 DUT_A1.42 DUT_A1.48 DUT_A1.57 DUT_B1.16 DUT_B1.19 DUT_B1.21 DUT_B1.24 DUT_B1.27 DUT_B1.31 DUT_B1.33 DUT_B1.37 DUT_B1.39 DUT_B1.42 DUT_B1.48 DUT_B1.57 IC1.3 IC3.3 IC4.3 IC5.3 IC6.3 IC7.3 IC8.6 IC9.6 IC10.3 IC12.3 IC13.3 IC14.3 IC15.3 IC16.3 IC17.6 IC18.6 IC19.1 IC19.16 IC20.6 IC21.6 IC35.6 IC35.8 IC35.10 IC35.12 IC41.9 P43.2 P43.3 P43.15 P43.23 P43.24 P44.1 P44.3 P44.12 P44.13 P44.14 P44.16 P44.17 P44.18 P44.19 P44.20 P44.21 P44.22 P44.23 P44.24 TEENSY1.0/RX TEENSY1.1/TX TEENSY1.3V3 TEENSY1.3V3_2 TEENSY1.3V3_LO TEENSY1.13/SCK TEENSY1.14/A0 TEENSY1.15/A1 TEENSY1.21/DAC0 TEENSY1.33/A14 TEENSY1.34/A15 TEENSY1.35/A16 TEENSY1.36/A17 TEENSY1.37/A18 TEENSY1.38/A19 TEENSY1.39/A20 TEENSY1.A10 TEENSY1.A11 TEENSY1.A22/DAC1 TEENSY1.AREF TEENSY1.GND3 TEENSY1.PROG TEENSY1.RESET TEENSY1.U5V TEENSY1.UD+ TEENSY1.UD- TEENSY1.UGND1 TEENSY1.UGND2 TEENSY1.VBAT TEENSY1.VIN TEENSY1.VUSB
copper on no net:
  other v1: 1428.39,1718.39 1471.69,1718.39 1515,1718.39 1558.31,1718.39 1601.61,1718.39 5038.39,1718.39 5081.69,1718.39 5125,1718.39 5168.31,1718.39 5211.61,1718.39 1428.39,1761.69 1471.69,1761.69 1515,1761.69 1558.31,1761.69 1601.61,1761.69 5038.39,1761.69 5081.69,1761.69 5125,1761.69 5168.31,1761.69 5211.61,1761.69 1428.39,1805 1471.69,1805 1515,1805 1558.31,1805 1601.61,1805 5038.39,1805 5081.69,1805 5125,1805 5168.31,1805 5211.61,1805 1428.39,1848.31 1471.69,1848.31 1515,1848.31 1558.31,1848.31 1601.61,1848.31 5038.39,1848.31 5081.69,1848.31 5125,1848.31 5168.31,1848.31 5211.61,1848.31 1428.39,1891.61 1471.69,1891.61 1515,1891.61 1558.31,1891.61 1601.61,1891.61 5038.39,1891.61 5081.69,1891.61 5125,1891.61 5168.31,1891.61 5211.61,1891.61

## Polygon pours and split planes (outlines as drawn)
no net on Top Plane (split plane): 14824.9,120.1 35.1,120.1 35.1,9784.9 14824.9,9784.9
no net on Bottom Plane (split plane): 14824.9,120.1 35.1,120.1 35.1,9784.9 14824.9,9784.9

## Silkscreen, mask and mechanical layers (free items; w line width, h text height)
Top Overlay:
  text "LDO" at 7450,7250 h20 r90
  text "PSU" at 7770,7250 h20 r90
  text "B" at 7825,7165 h20
  text "LDO" at 6450,7130 h20 r90
  text "PSU" at 6550,7130 h20 r90
  text "A" at 7825,7045 h20
  text "MAIN" at 7919.99,7010.03 h60 r90
  text "SHIFT" at 6699.99,6980.04 h60 r90
  text "LDO" at 7450,6750 h20 r90
  text "PSU" at 7770,6750 h20 r90
  text "B" at 7825,6665 h20
  text "LDO" at 6450,6630 h20 r90
  text "PSU" at 6550,6630 h20 r90
  text "VA" at 6699.99,6565.02 h60 r90
  text "A" at 7825,6545 h20
  text "SMALL" at 7919.99,6475.05 h60 r90
  text "LDO" at 7450,6250 h20 r90
  text "PSU" at 7770,6250 h20 r90
  text "B" at 7825,6165 h20
  text "LDO" at 6450,6130 h20 r90
  text "PSU" at 6550,6130 h20 r90
  text "VD" at 6699.99,6065.02 h60 r90
  text "A" at 7825,6045 h20
  text "AON" at 7919.99,6035.03 h60 r90
  text "USB ->" at 3510.01,5924.95 h60 r270
  text "LDO" at 7450,5630 h20 r90
  text "PSU" at 7770,5630 h20 r90
  text "TEST" at 7919.99,5505.04 h60 r90
  text "3p3VLDO" at 5966,5500 h30
  text "3p3VPSU" at 5966,5400 h30
  text "VDDHV" at 5961,5135 h30
  text "3p3VPSU" at 5961,5040 h30
  text "BG" at 1439.99,3075 h60 r90
  text "DAC_SMALL" at 1554.99,3075 h60 r90
  text "DAC_MAIN" at 1674.99,3075 h60 r90
  text "REF_PREAMP" at 1794.99,3075 h60 r90
  text "OUT_PK" at 1914.99,3075 h60 r90
  text "BG" at 5049.99,3075 h60 r90
  text "DAC_SMALL" at 5164.99,3075 h60 r90
  text "DAC_MAIN" at 5284.99,3075 h60 r90
  text "REF_PREAMP" at 5404.99,3075 h60 r90